# Altium PCB MGMEZZ02.PCBDOC (part 1 of 5)
Units mil, origin at the board's own origin, x right, y up, seen from the top; angles counter-clockwise.
Board outline 5705.83 x 3625.73 mil, 6 copper layers (Top Layer, Internal Plane 1, Mid-Layer 1, Mid-Layer 2, Internal Plane 2, Bottom Layer); 570 components, 354 nets, 2192 pads, 728 vias.
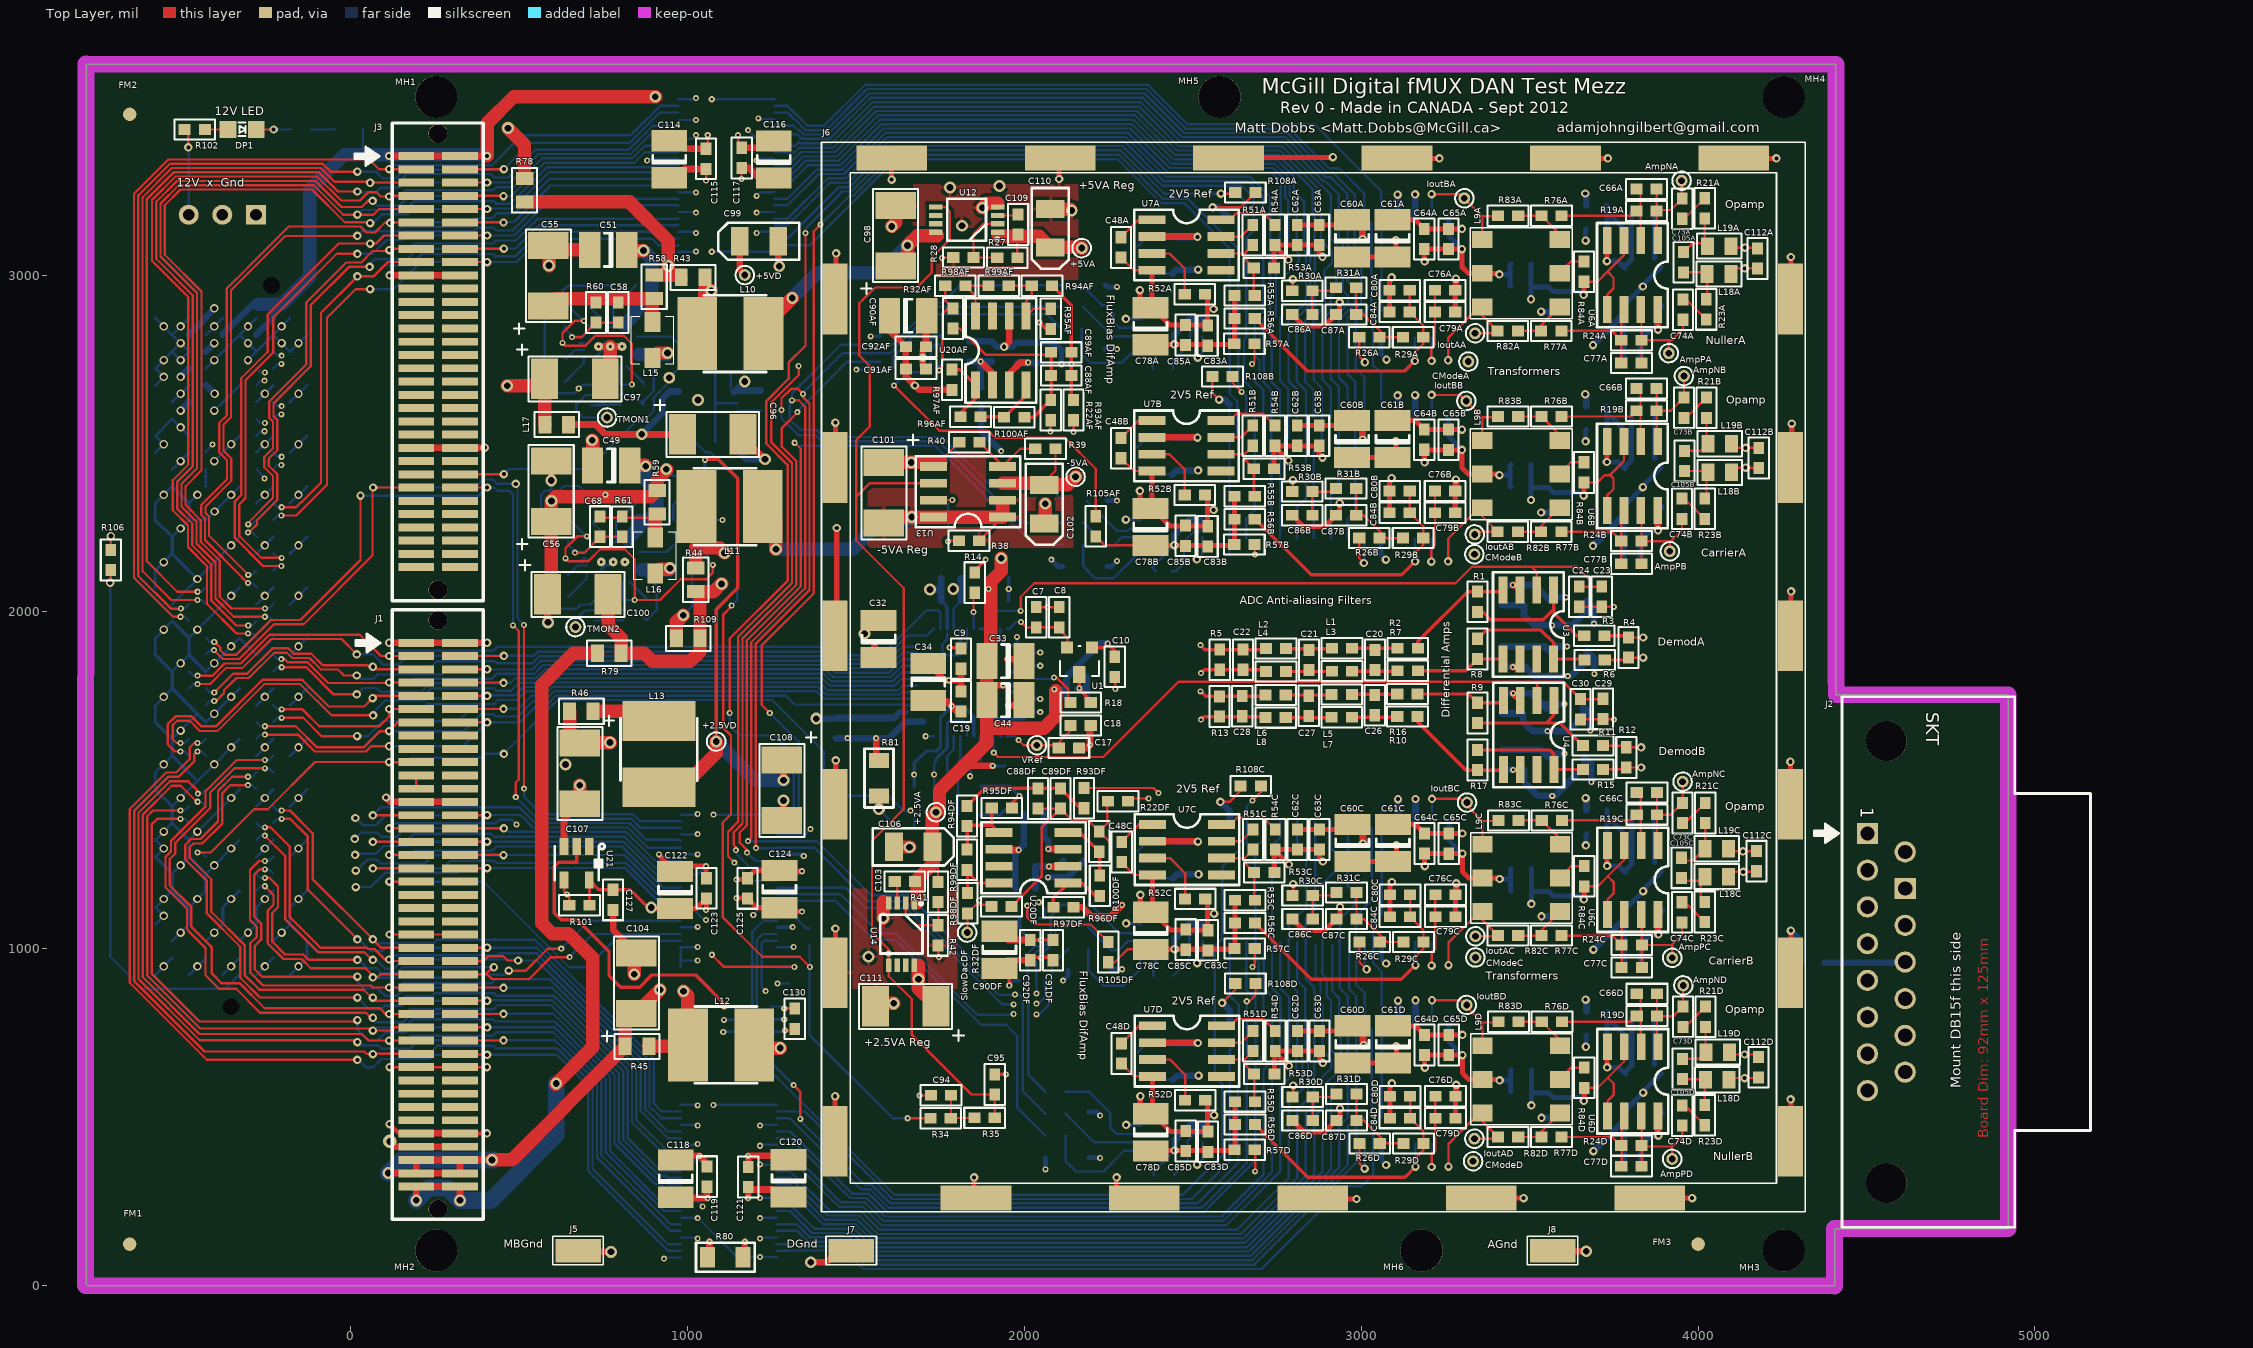
[diagram p0: Top Layer view]
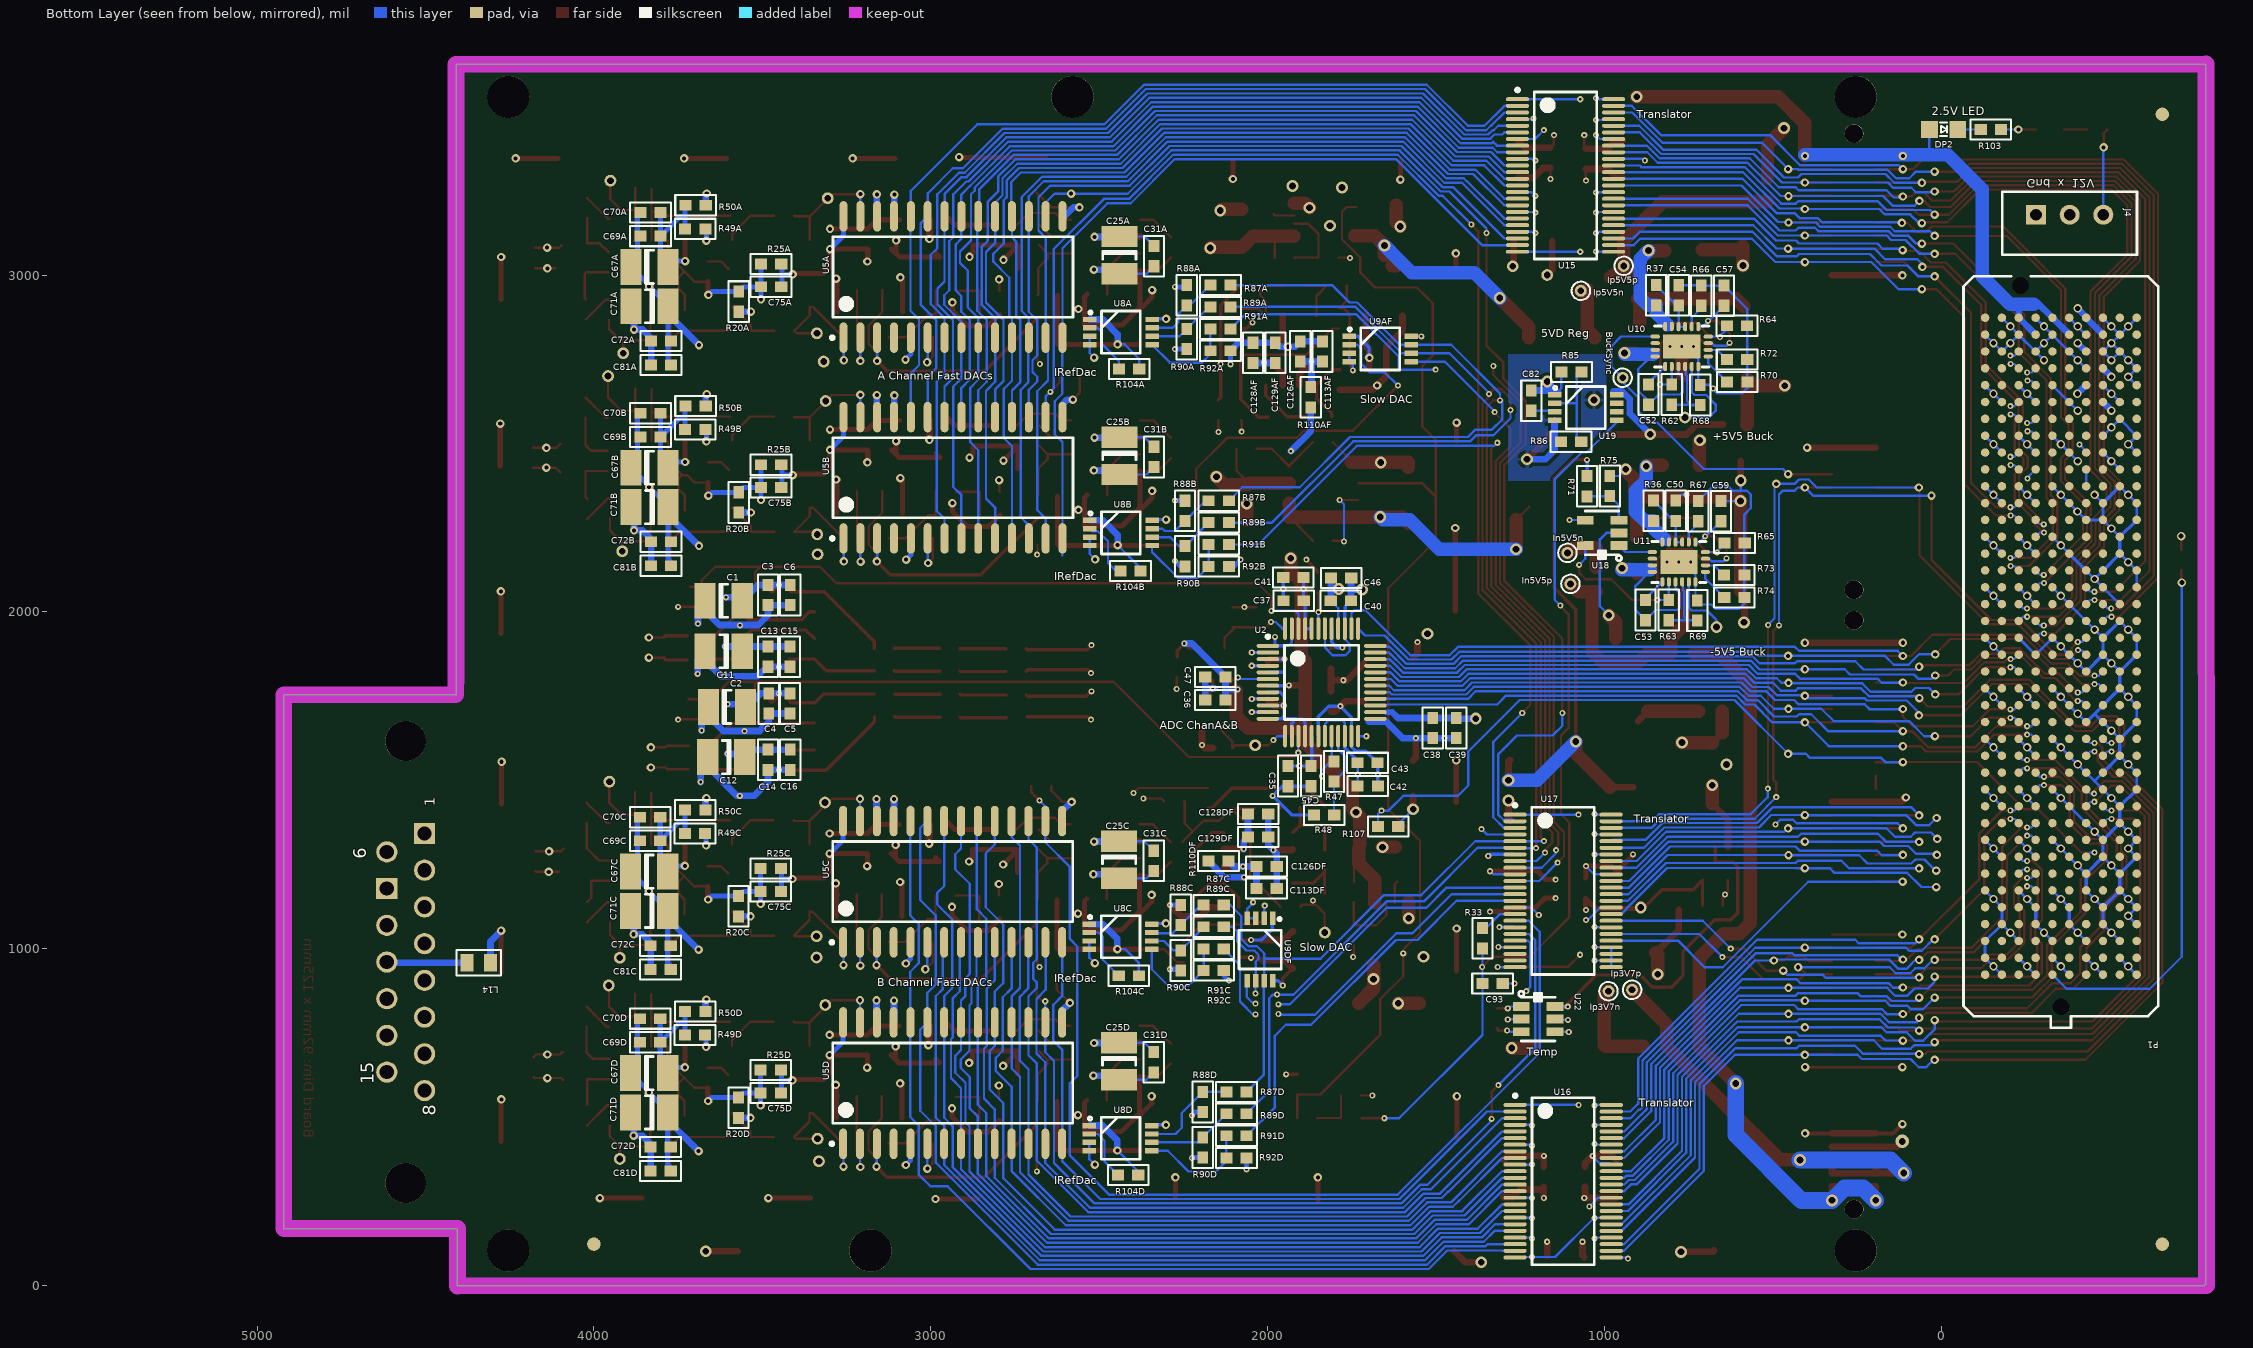
[diagram p1: Bottom Layer view, seen from below]
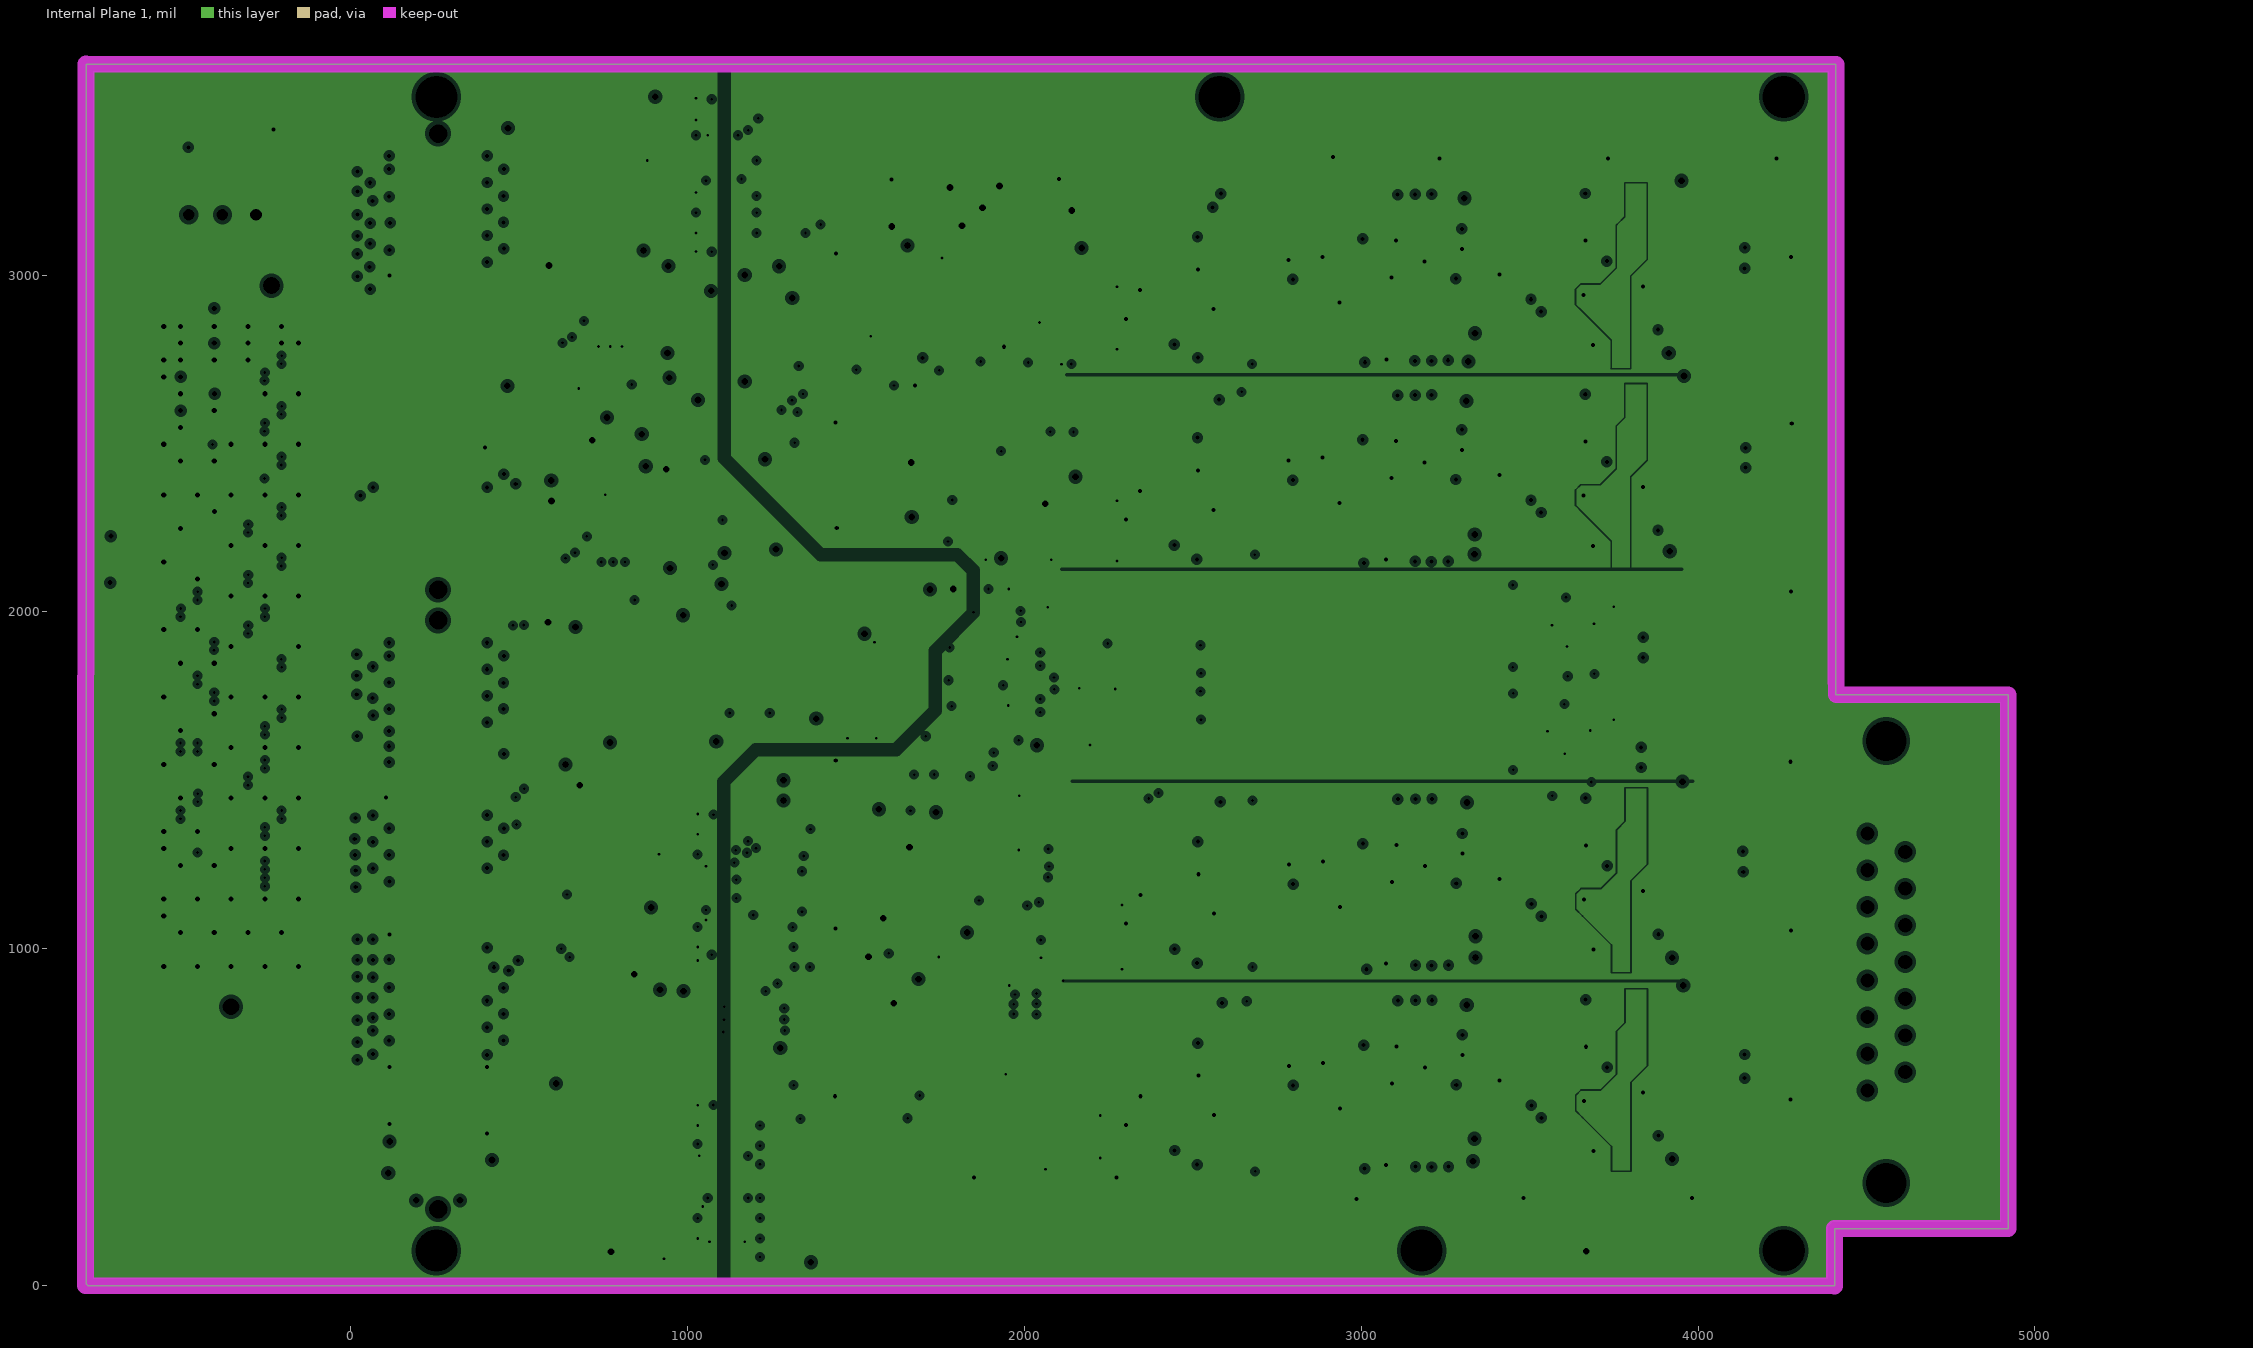
[diagram p2: Internal Plane 1, clearances drawn from the general rule]
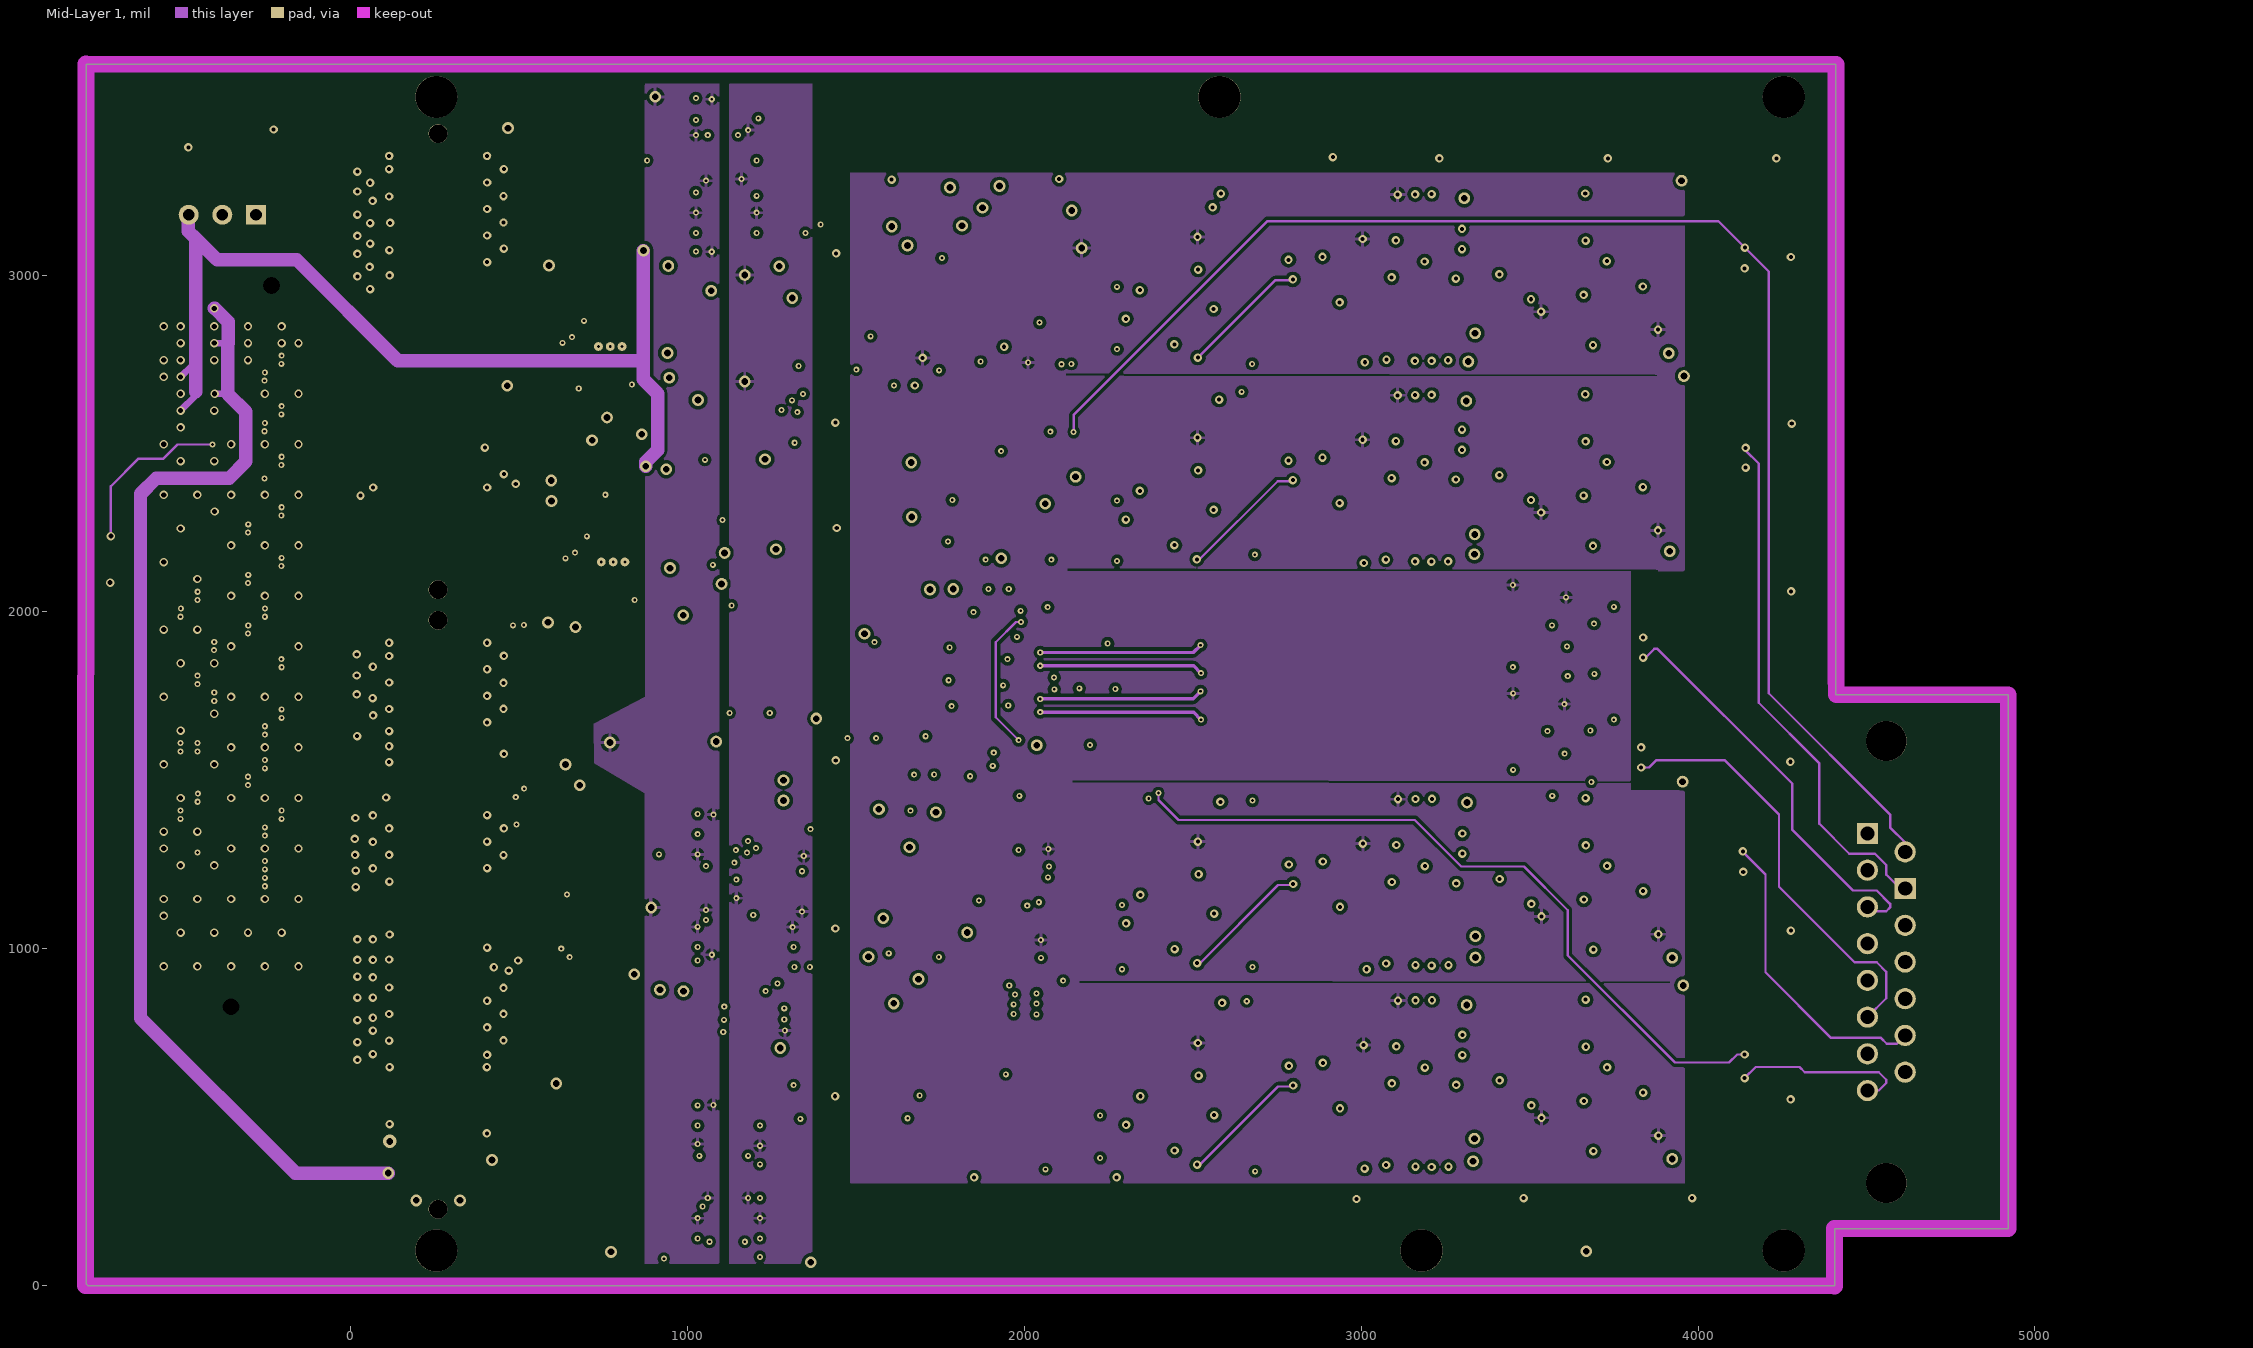
[diagram p3: Mid-Layer 1]
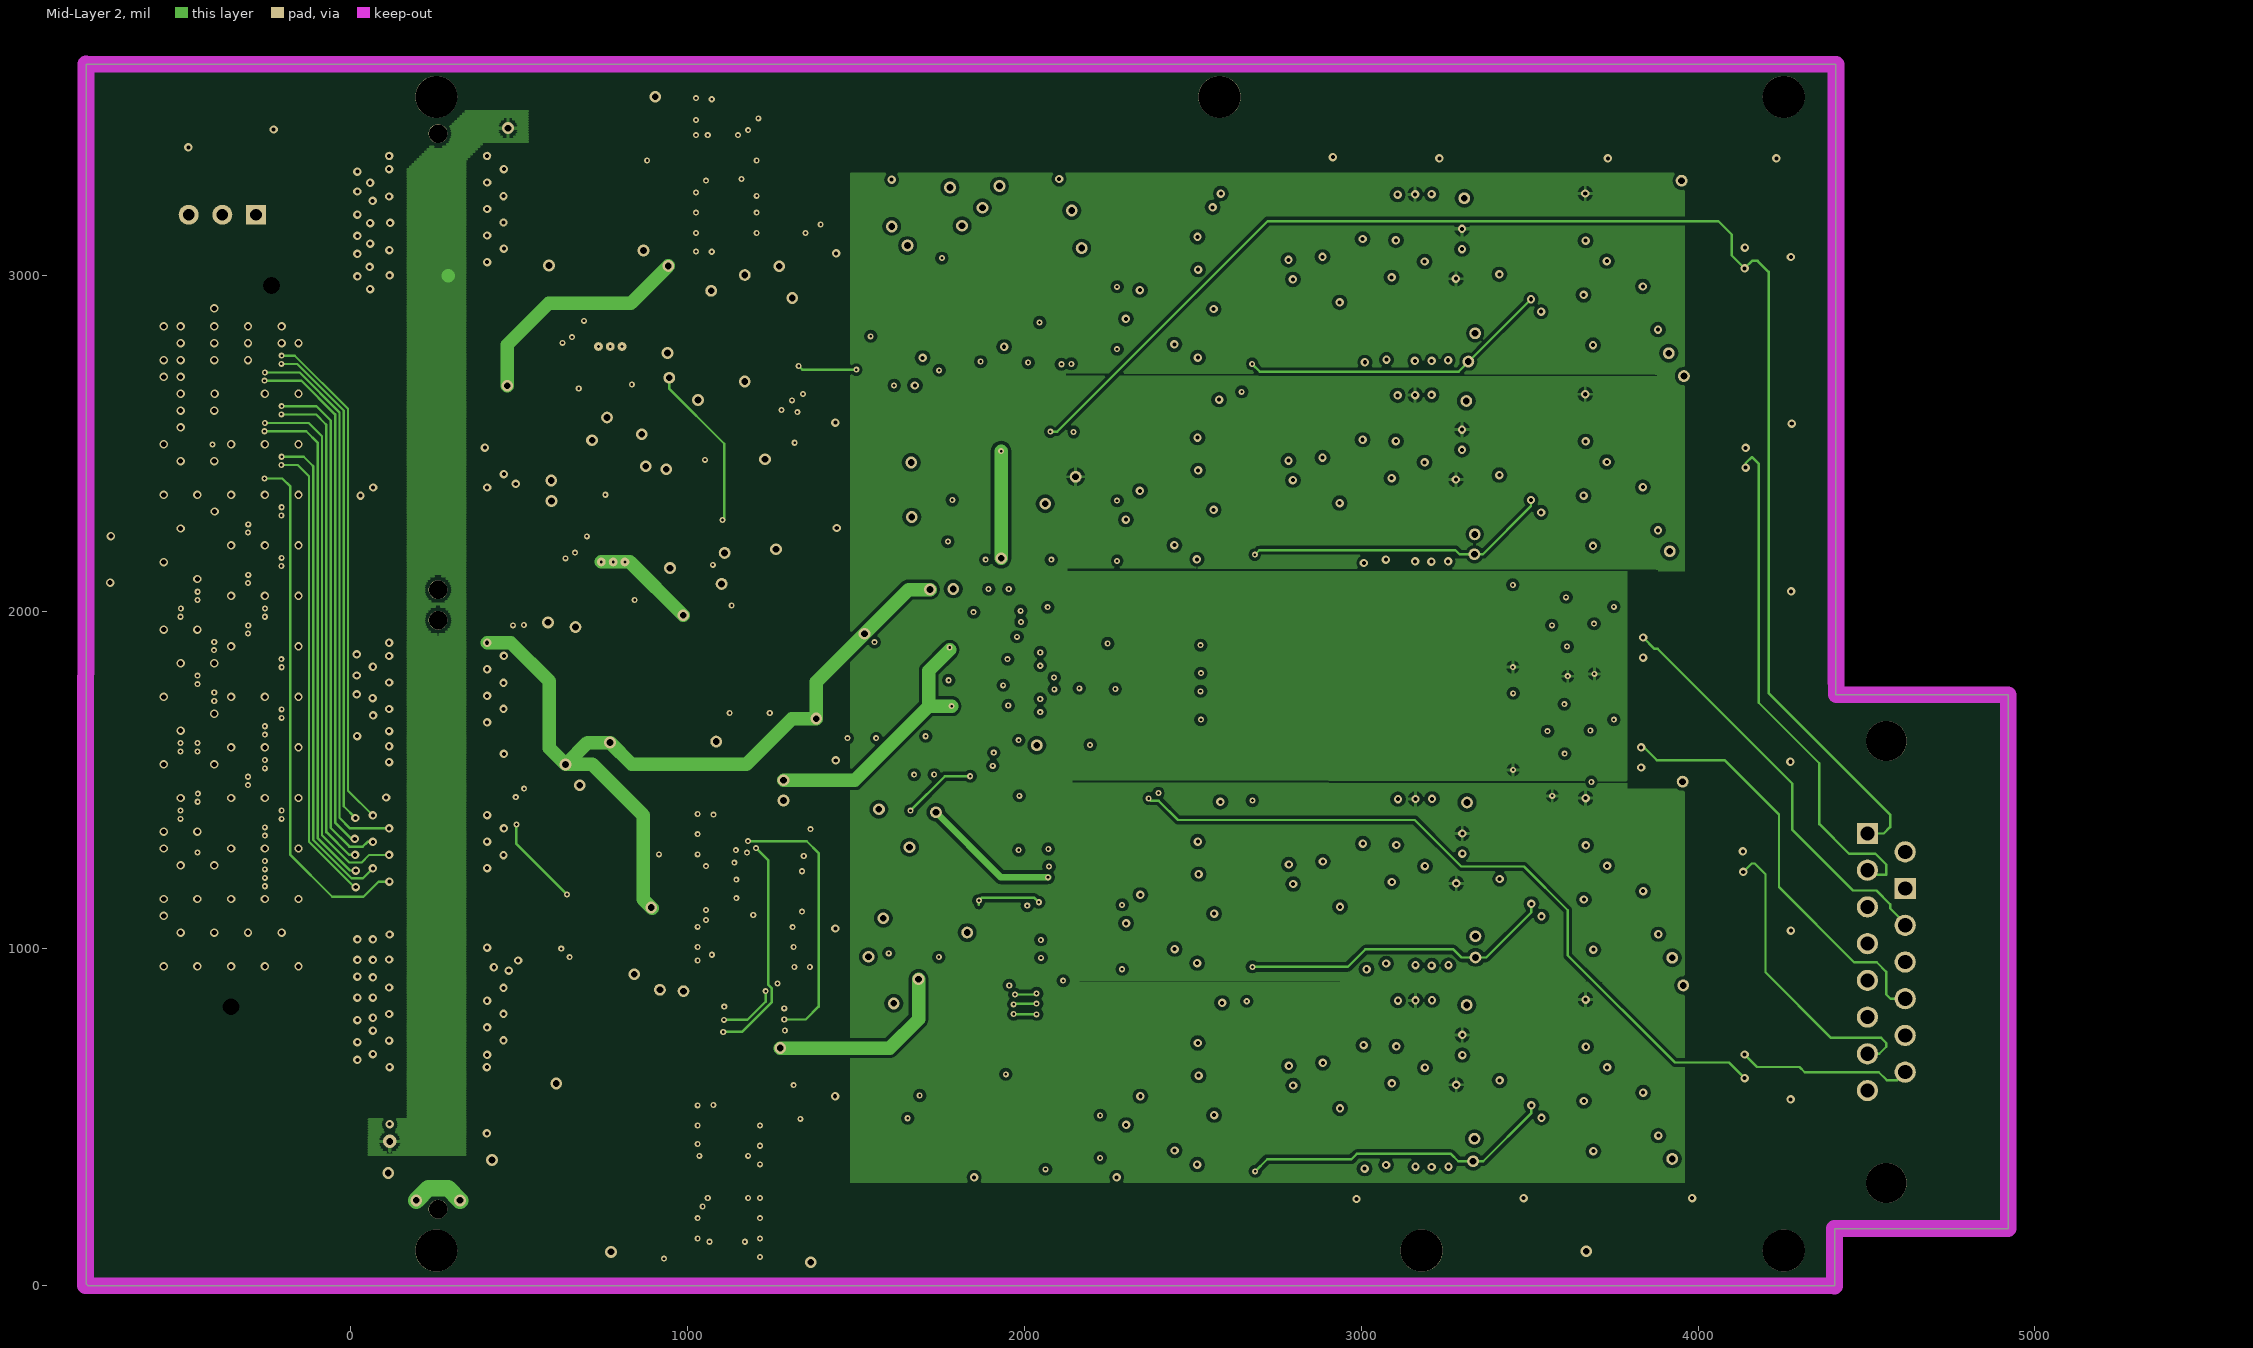
[diagram p4: Mid-Layer 2]
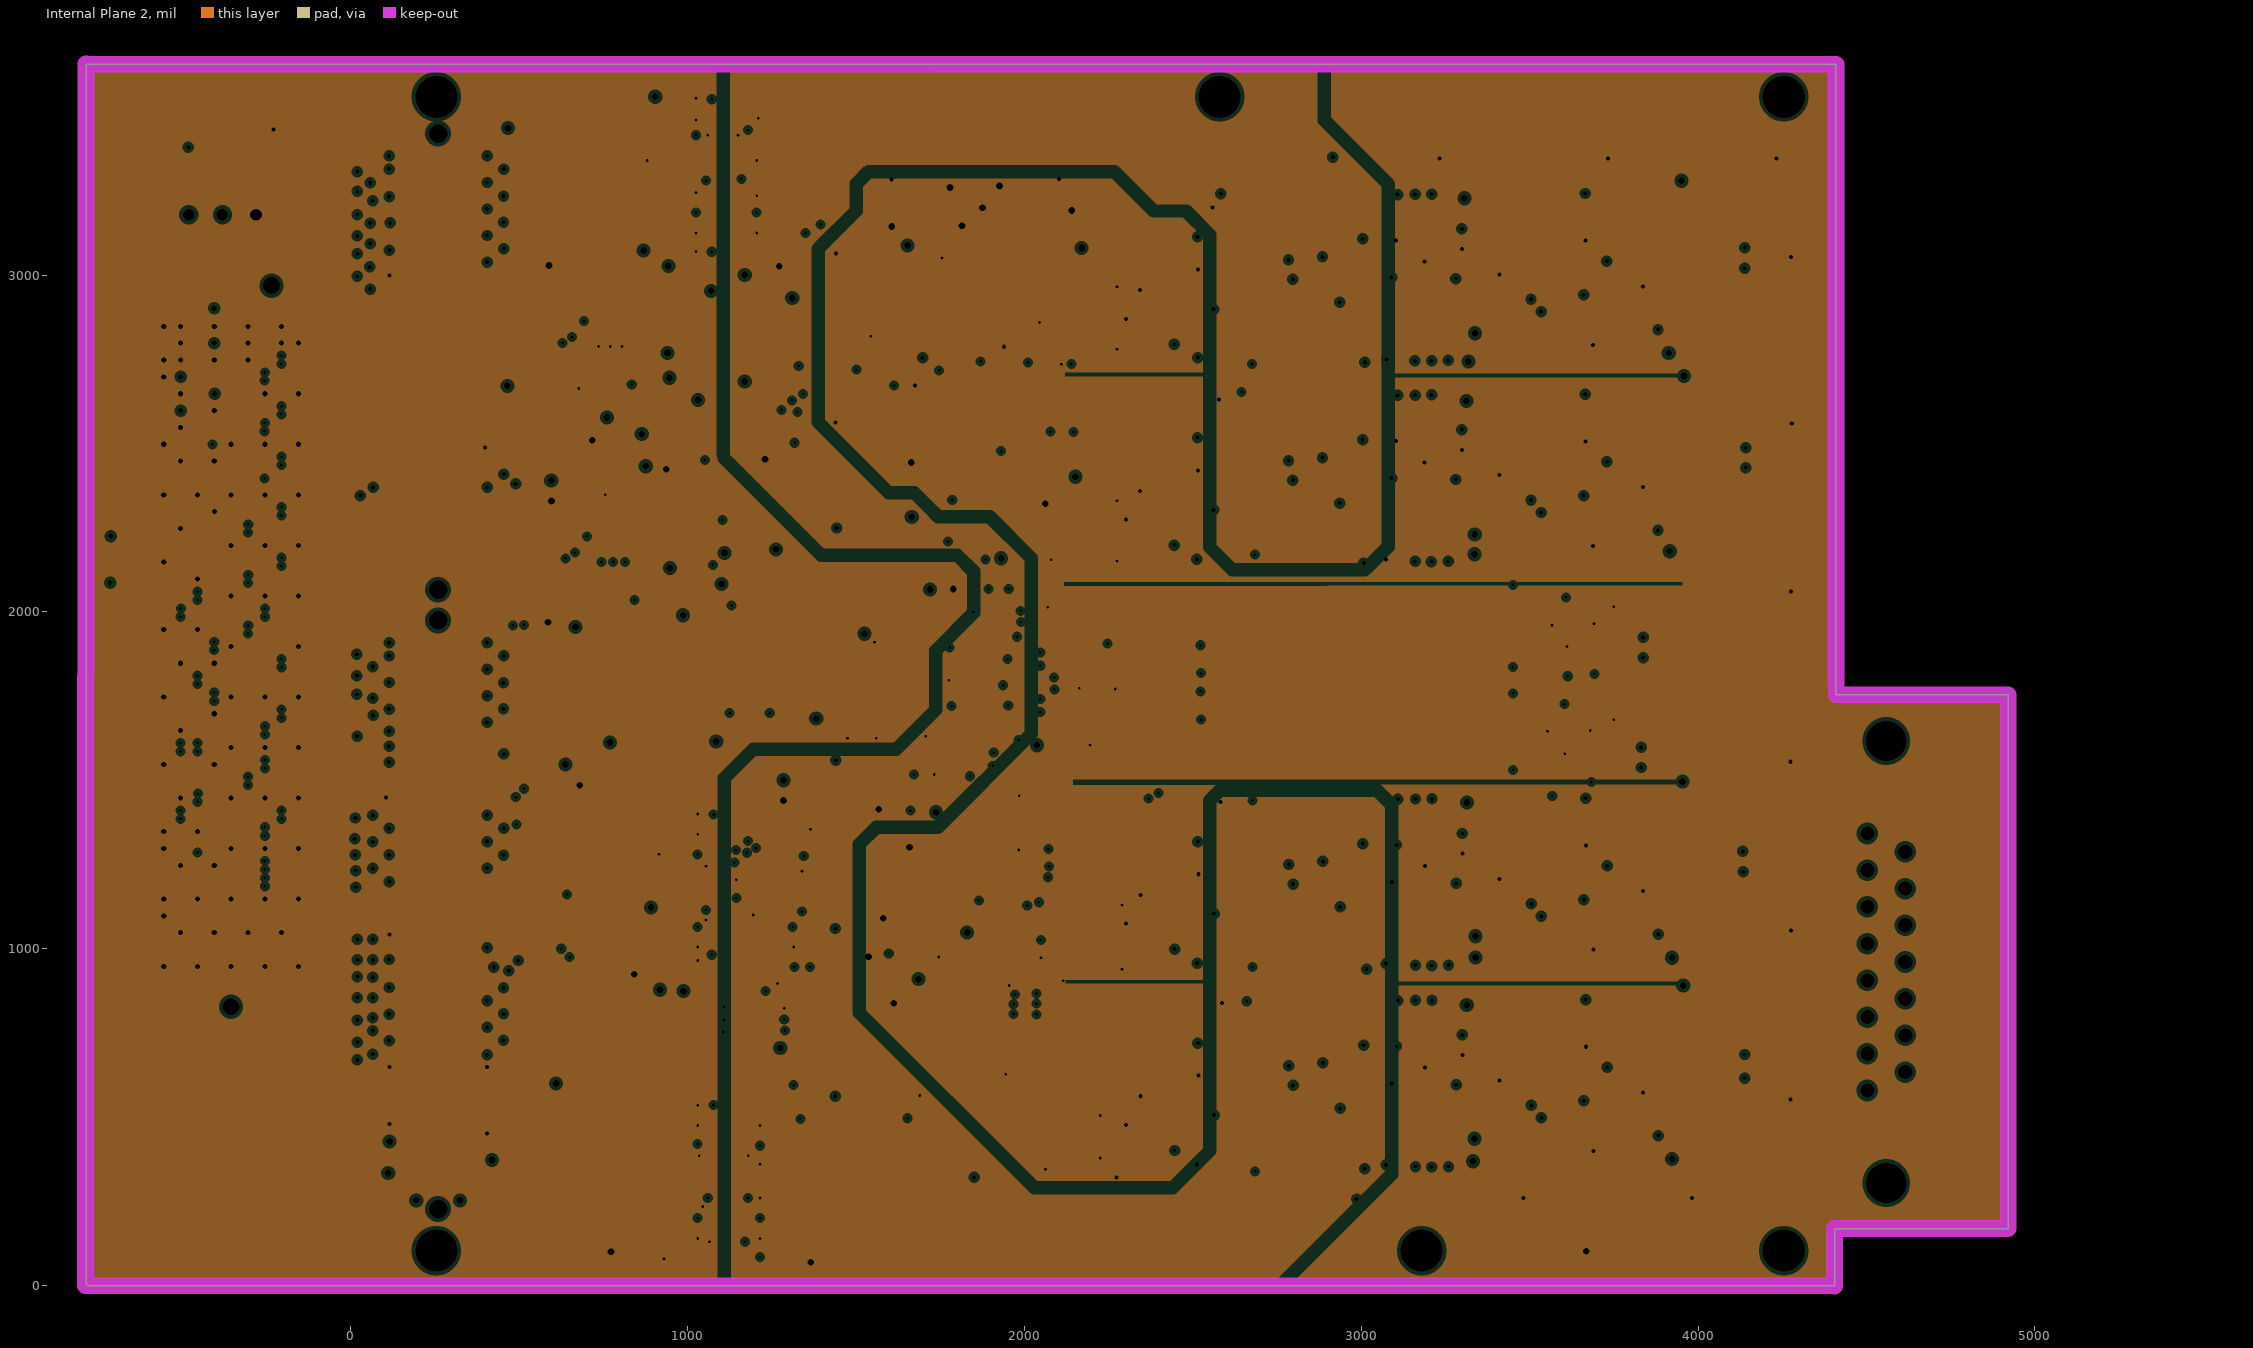
[diagram p5: Internal Plane 2, clearances drawn from the general rule]

## Layer stack, top to bottom
Top Layer: signal copper 1.4
Dielectric: core 12.6, FR-4, Dk 4.8
Internal Plane 1: plane copper 1.4, net (Multiple Nets)
Dielectric: prepreg 12.6, FR-4, Dk 4.8
Mid-Layer 1: signal copper 1.4
Dielectric: core 12.6, FR-4, Dk 4.8
Mid-Layer 2: signal copper 1.4
Dielectric: prepreg 12.6, FR-4, Dk 4.8
Internal Plane 2: plane copper 1.4, net (Multiple Nets)
Dielectric: core 12.6, FR-4, Dk 4.8
Bottom Layer: signal copper 1.4

## Board outline
-785,5 -785,3625.73 4409.07,3625.73 4409.07,1754 4920.83,1754 4920.83,169 4405,169 4405,0 -780,0

## Design rules (kind name [scope] priority, off if disabled: settings)
Clearance Clearance_1 [(InPoly)] p1: gap=10
Clearance [All] p2: gap=6
ComponentClearance [All] p1 off: gap=10 collisioncheckmode=3 verticalgap=10 showdistances=FALSE
DiffPairsRouting [All] p1: maxlimit=10 minlimit=10 mostfreqgap=10 maxuncoupledlength=500
FabricationTestPointUsage TestPointUsage [All] p1: valid=0 allowmultiple=FALSE
FabricationTestpoint Testpoint [All] p1: side=3 testpointundercomponent=TRUE minsize=40 maxsize=100 preferedsize=60 minholesize=20 maxholesize=40 preferedholesize=32 testpointgrid=1 allowsidetop=TRUE allowsidebottom=TRUE usegrid=TRUE gridtolerance=0.01
HoleSize [All] p1: absolutevalues=TRUE maxlimit=250 minlimit=8 maxpercent=80.000 minpercent=20.000
PlaneClearance [All] p1: clearance=11
PlaneConnect PlaneConnect_1 [All] p1: planeconnectstyle=Direct reliefexpansion=20 reliefentries=4 reliefconductorwidth=10 reliefairgap=10
PlaneConnect [All] p2: planeconnectstyle=Relief reliefexpansion=20 reliefentries=4 reliefconductorwidth=10 reliefairgap=12
PolygonConnect [All] p1: connectstyle=Relief reliefconductorwidth=10 reliefentries=4 polygonreliefangle="90 Angle" airgapwidth=10
RoomDefinition C [InComponentClass('C')] p1: confinementstyle=ConfineIn formatcopy=TRUE lockcomponents=FALSE outline 2243,903 4099,903 4099,1501 2243,1501
RoomDefinition DF [InComponentClass('DF')] p2: confinementstyle=ConfineIn formatcopy=TRUE lockcomponents=FALSE outline -3458.97,-4906.75 -1458.97,-4906.75 -1458.97,-3906.75 -3458.97,-3906.75
RoomDefinition Conn1 [InComponentClass('Conn1')] p3: confinementstyle=ConfineIn formatcopy=TRUE lockcomponents=FALSE outline -3458.97,-4906.75 -1458.97,-4906.75 -1458.97,-3906.75 -3458.97,-3906.75
RoomDefinition AF [InComponentClass('AF')] p4: confinementstyle=ConfineIn formatcopy=TRUE lockcomponents=FALSE outline -3458.97,-4906.75 -1458.97,-4906.75 -1458.97,-3906.75 -3458.97,-3906.75
RoomDefinition Power [InComponentClass('Power')] p5: confinementstyle=ConfineIn formatcopy=TRUE lockcomponents=FALSE outline -3458.97,-4906.75 -1458.97,-4906.75 -1458.97,-3906.75 -3458.97,-3906.75
RoomDefinition MGMEZZ02 [InComponentClass('MGMEZZ02')] p6: confinementstyle=ConfineIn formatcopy=TRUE lockcomponents=FALSE outline -3458.97,-4906.75 -1458.97,-4906.75 -1458.97,-3906.75 -3458.97,-3906.75
RoomDefinition Lvl [InComponentClass('Lvl')] p7: confinementstyle=ConfineIn formatcopy=TRUE lockcomponents=FALSE outline -3458.97,-4906.75 -1458.97,-4906.75 -1458.97,-3906.75 -3458.97,-3906.75
RoomDefinition Conn2 [InComponentClass('Conn2')] p8: confinementstyle=ConfineIn formatcopy=TRUE lockcomponents=FALSE outline -3458.97,-4906.75 -1458.97,-4906.75 -1458.97,-3906.75 -3458.97,-3906.75
RoomDefinition A [InComponentClass('A')] p9: confinementstyle=ConfineIn formatcopy=TRUE lockcomponents=FALSE outline 2242,2698 4098,2698 4098,3296 2242,3296
RoomDefinition D [InComponentClass('D')] p10: confinementstyle=ConfineIn formatcopy=TRUE lockcomponents=FALSE outline 2243,305 4099,305 4099,903 2243,903
RoomDefinition B [InComponentClass('B')] p11: confinementstyle=ConfineIn formatcopy=TRUE lockcomponents=FALSE outline 2242,2102 4098,2102 4098,2700 2242,2700
RoomDefinition ADC [InComponentClass('ADC')] p12: confinementstyle=ConfineIn formatcopy=TRUE lockcomponents=FALSE outline 1344.06,1433 3855,1433 3855,2162.02 1344.06,2162.02
RoutingVias [All] p1: holewidth=12 width=25 viastyle="Through Hole" minholewidth=12 minwidth=22 maxholewidth=28 maxwidth=50
SilkscreenOverComponentPads [All] p1: minsilkscreentomaskgap=10
SolderMaskExpansion [All] p1: expansion=4
Width [All] p1: maxlimit=100 minlimit=2 preferedwidth=7
20 further rules are at their usual default settings.

## Classes and differential pairs
component class DF: C88DF C89DF C90DF C91DF C92DF C113DF C126DF C128DF C129DF R22DF R32DF R93DF R94DF R95DF R96DF R97DF R98DF R99DF R100DF R105DF R110DF SlowDacDF U9DF U20DF
component class AF: C88AF C89AF C90AF C91AF C92AF C113AF C126AF C128AF C129AF R22AF R32AF R93AF R94AF R95AF R96AF R97AF R98AF R99AF R100AF R105AF R110AF U9AF U20AF
channel class SlowDAC: SlowDac1 SlowDac2
channel class FastDAC: A B C D
component class D: AmpND AmpPD C25D C31D C48D C60D C61D C62D C63D C64D C65D C66D C67D C69D C70D C71D C72D C73D C74D C75D C76D C77D C78D C79D C80D C81D C83D C84D C85D C86D C87D C105D C112D CModeD IoutAD IoutBD L9D L18D L19D R19D R20D R21D R23D R24D R25D R26D R29D R30D R31D R49D R50D R51D R52D R53D R54D R55D R56D R57D R76D R77D R82D R83D R84D R87D R88D R89D R90D R91D R92D R104D R108D U5D U6D U7D U8D
component class Power: +2.5VA +2.5VD +5VA +5VD -5VA BuckSync C49 C50 C51 C52 C53 C54 C55 C56 C57 C58 C59 C68 C82 C93 C94 C95 C96 C97 C98 C99 C100 C101 C102 C103 C104 C106 C107 C108 C109 C110 C111 DP1 DP2 In5V5n In5V5p Ip3V7n Ip3V7p Ip5V5n Ip5V5p J4 L10 L11 L12 L13 L15 L16 L17 R27 R28 R33 R34 R35 R36 R37 R38 R39 R40 R41 R42 R43 R44 R45 R46 R58 R59 R60 R61 R62 R63 R64 R65 R66 R67 R68 R69 R70 R71 R72 R73 R74 R75 R78 R79 R80 R81 R85 R86 R102 R103 R109 TMON1 TMON2 U10 U11 U12 U13 U14 U18 U19
component class C: AmpNC AmpPC C25C C31C C48C C60C C61C C62C C63C C64C C65C C66C C67C C69C C70C C71C C72C C73C C74C C75C C76C C77C C78C C79C C80C C81C C83C C84C C85C C86C C87C C105C C112C CModeC IoutAC IoutBC L9C L18C L19C R19C R20C R21C R23C R24C R25C R26C R29C R30C R31C R49C R50C R51C R52C R53C R54C R55C R56C R57C R76C R77C R82C R83C R84C R87C R88C R89C R90C R91C R92C R104C R108C U5C U6C U7C U8C
component class Lvl: C114 C115 C116 C117 C118 C119 C120 C121 C122 C123 C124 C125 C127 C130 R101 U15 U16 U17 U21 U22
component class B: AmpNB AmpPB C25B C31B C48B C60B C61B C62B C63B C64B C65B C66B C67B C69B C70B C71B C72B C73B C74B C75B C76B C77B C78B C79B C80B C81B C83B C84B C85B C86B C87B C105B C112B CModeB IoutAB IoutBB L9B L18B L19B R19B R20B R21B R23B R24B R25B R26B R29B R30B R31B R49B R50B R51B R52B R53B R54B R55B R56B R57B R76B R77B R82B R83B R84B R87B R88B R89B R90B R91B R92B R104B R108B U5B U6B U7B U8B
component class A: AmpNA AmpPA C25A C31A C48A C60A C61A C62A C63A C64A C65A C66A C67A C69A C70A C71A C72A C73A C74A C75A C76A C77A C78A C79A C80A C81A C83A C84A C85A C86A C87A C105A C112A CModeA IoutAA IoutBA L9A L18A L19A R19A R20A R21A R23A R24A R25A R26A R29A R30A R31A R49A R50A R51A R52A R53A R54A R55A R56A R57A R76A R77A R82A R83A R84A R87A R88A R89A R90A R91A R92A R104A R108A U5A U6A U7A U8A
component class ADC: C1 C2 C3 C4 C5 C6 C7 C8 C9 C10 C11 C12 C13 C14 C15 C16 C17 C18 C19 C20 C21 C22 C23 C24 C26 C27 C28 C29 C30 C32 C33 C34 C35 C36 C37 C38 C39 C40 C41 C42 C43 C44 C45 C46 C47 C138 L1 L2 L3 L4 L5 L6 L7 L8 R1 R2 R3 R4 R5 R6 R7 R8 R9 R10 R11 R12 R13 R14 R15 R16 R17 R18 R47 R48 R107 U1 U2 U3 U4 VRef
component class MGMEZZ02: FM1 FM2 FM3 J2 J5 J6 J7 J8 L14 MH1 MH2 MH3 MH4 MH5 MH6
component class Conn1: J1 J3
component class Conn2: P1 R106
differential pair DACD: +DACD_P -DACD_N
differential pair DACC: +DACC_P -DACC_N
differential pair DACB: +DACB_P -DACB_N
differential pair DACA: +DACA_P -DACA_N
differential pair ADCB: +ADCB_P -ADCB_N
differential pair ADCA: +ADCA_P -ADCA_N

## Components (designator, comment, footprint, x,y, rotation, side; value= is the part's Value field where it differs from the comment)
+2.5VA "TestPoint" TP-3520-SK 1737.44,1405.02 r0 top
+2.5VD "TestPoint" TP-3520-SK 1085,1615 r90 top
+5VA "TestPoint" TP-3520-SK 2169.94,3079.91 r270 top
+5VD "TestPoint" TP-3520-SK 1170,2999.97 r90 top
-5VA "TestPoint" TP-3520-SK 2152,2401 r270 top
AmpNA "TestPoint" TP-3520-SK 3951,3280 r90 top (schematic designator AmpN)
AmpNB "TestPoint" TP-3520-SK 3958,2700 r90 top (schematic designator AmpN)
AmpNC "TestPoint" TP-3520-SK 3954,1496 r90 top (schematic designator AmpN)
AmpND "TestPoint" TP-3520-SK 3956,891 r90 top (schematic designator AmpN)
AmpPA "TestPoint" TP-3520-SK 3913,2768 r90 top (schematic designator AmpP)
AmpPB "TestPoint" TP-3520-SK 3916,2180 r90 top (schematic designator AmpP)
AmpPC "TestPoint" TP-3520-SK 3923,973 r90 top (schematic designator AmpP)
AmpPD "TestPoint" TP-3520-SK 3923,376 r90 top (schematic designator AmpP)
BuckSync "TestPoint" TP-3520-SK 946,2695 r90 bottom
C1 "33uF" CC3225-1210 3615,2033 r180 bottom
C2 "33uF" CC3225-1210 3605,1718 r180 bottom
C3 "1uF" 0603 3483,2020 r90 bottom
C4 "1uF" 0603 3481,1698 r90 bottom
C5 "0.1uF" 0603 3418,1758 r270 bottom
C6 "0.1uF" 0603 3417,2080 r270 bottom
C7 "1uF" 0603 2035.22,2014 r270 top
C8 "10nF" 0603 2103.22,2014 r270 top
C9 "470nF" 0603 1812,1831 r90 top
C10 "1uF" 0603 2268.18,1806.76 r90 top
C11 "33uF" CC3225-1210 3615,1883 r0 bottom
C12 "33uF" CC3225-1210 3607,1569 r0 bottom
C13 "1uF" 0603 3483,1897 r270 bottom
C14 "1uF" 0603 3483,1591 r270 bottom
C15 "0.1uF" 0603 3418,1837 r90 bottom
C16 "0.1uF" 0603 3417,1531 r90 bottom
C17 "1uF" 0603 2162,1596 r180 top
C18 "10nF" 0603 2197,1663 r180 top
C19 "470nF" 0603 1812,1764 r270 top
C20 "16p" 0603 3041,1827 r90 top
C21 "100p" 0603 2845,1827 r90 top
C22 "16p" 0603 2649,1828 r90 top
C23 "1uF" 0603 3714,2015 r90 top
C24 "10nF" 0603 3647,2015 r90 top
C25A "33uF" CC3225-1210 2440,3059 r270 bottom (schematic designator C25)
C25B "33uF" CC3225-1210 2440,2463 r270 bottom (schematic designator C25)
C25C "33uF" CC3225-1210 2441,1264 r270 bottom (schematic designator C25)
C25D "33uF" CC3225-1210 2441,666 r270 bottom (schematic designator C25)
C26 "16p" 0603 3040,1693 r90 top
C27 "100p" 0603 2844,1691 r90 top
C28 "16p" 0603 2647,1690 r90 top
C29 "1uF" 0603 3718,1682 r90 top
C30 "10nF" 0603 3651,1681 r90 top
C31A "1nF" 0603 2337,3086 r270 bottom (schematic designator C31)
C31B "1nF" 0603 2337,2490 r270 bottom (schematic designator C31)
C31C "1nF" 0603 2338,1291 r270 bottom (schematic designator C31)
C31D "1nF" 0603 2338,693 r270 bottom (schematic designator C31)
C32 "33uF" CC3225-1210 1567.31,1919.46 r90 top
C33 "33uF" CC3225-1210 1944,1854 r180 top
C34 "33uF" CC3225-1210 1714.35,1791.73 r270 top
C35 "470nF" 0603 1939.78,1482.41 r90 bottom
C36 "470nF" 0603 2185.22,1738.4 r180 bottom
C37 "470nF" 0603 1952.59,2032.78 r180 bottom
C38 "470nF" 0603 1510,1625 r90 bottom
C39 "470nF" 0603 1440,1625 r90 bottom
C40 "470nF" 0603 1812.59,2032.78 r180 bottom
C41 "470nF" 0603 1953.59,2101.78 r180 bottom
C42 "470nF" 0603 1732.59,1482.78 r180 bottom
C43 "470nF" 0603 1733.59,1551.78 r180 bottom
C44 "33uF" CC3225-1210 1944,1738 r180 top
C45 "470nF" 0603 1870.78,1482.41 r90 bottom
C46 "470nF" 0603 1811.59,2100.78 r180 bottom
C47 "470nF" 0603 2185.22,1806.4 r180 bottom
C48A "DNL" 0603 2287,3112 r270 top (schematic designator C48)
C48B "DNL" 0603 2287,2516 r270 top (schematic designator C48)
C48C "DNL" 0603 2289,1317 r270 top (schematic designator C48)
C48D "DNL" 0603 2288,719 r270 top (schematic designator C48)
C49 "33uF" CC3225-1210 773.07,2434.64 r180 top
C50 "0.33uF" 0603 788.3,2330.09 r270 bottom
C51 "33uF" CC3225-1210 764.48,3074.33 r180 top
C52 "0.1uF" 0603 869.39,2614.96 r90 bottom
C53 "0.1uF" 0603 877.98,1975.27 r90 bottom
C54 "0.33uF" 0603 779.72,2969.78 r270 bottom
C55 "33uF" TANT4532 586.85,2907.97 r90 top
C56 "33uF" TANT4532 595.43,2268.28 r90 top
C57 "2.2uF" 0603 645.51,2968.62 r270 bottom
C58 "22pF" 0603 794.53,2858.6 r90 top
C59 "2.2uF" 0603 654.09,2328.94 r270 bottom
C60A "33uF" CC3225-1210 2973,3109 r90 top (schematic designator C60)
C60B "33uF" CC3225-1210 2973,2513 r90 top (schematic designator C60)
C60C "33uF" CC3225-1210 2974,1314 r90 top (schematic designator C60)
C60D "33uF" CC3225-1210 2974,716 r90 top (schematic designator C60)
C61A "33uF" CC3225-1210 3093,3109 r90 top (schematic designator C61)
C61B "33uF" CC3225-1210 3093,2513 r90 top (schematic designator C61)
C61C "33uF" CC3225-1210 3094,1314 r90 top (schematic designator C61)
C61D "33uF" CC3225-1210 3094,716 r90 top (schematic designator C61)
C62A "0.1uF" 0603 2810,3089 r90 top (schematic designator C62)
C62B "0.1uF" 0603 2810,2493 r90 top (schematic designator C62)
C62C "0.1uF" 0603 2811,1294 r90 top (schematic designator C62)
C62D "0.1uF" 0603 2811,696 r90 top (schematic designator C62)
C63A "1uF" 0603 2875,3089 r90 top (schematic designator C63)
C63B "1uF" 0603 2875,2493 r90 top (schematic designator C63)
C63C "1uF" 0603 2876,1294 r90 top (schematic designator C63)
C63D "1uF" 0603 2876,696 r90 top (schematic designator C63)
C64A "0.1uF" 0603 3187,3077.12 r90 top (schematic designator C64)
C64B "0.1uF" 0603 3187,2481.12 r90 top (schematic designator C64)
C64C "0.1uF" 0603 3188,1282.12 r90 top (schematic designator C64)
C64D "0.1uF" 0603 3188,684.12 r90 top (schematic designator C64)
C65A "1uF" 0603 3259,3077 r90 top (schematic designator C65)
C65B "1uF" 0603 3259,2481 r90 top (schematic designator C65)
C65C "1uF" 0603 3260,1282 r90 top (schematic designator C65)
C65D "1uF" 0603 3260,684 r90 top (schematic designator C65)
C66A "10pF" 0603 3817,3255 r0 top (schematic designator C66)
C66B "10pF" 0603 3817,2663 r0 top (schematic designator C66)
C66C "10pF" 0603 3818,1464 r0 top (schematic designator C66)
C66D "10pF" 0603 3818,866 r0 top (schematic designator C66)
C67A "33uF" CC3225-1210 3835,3024 r180 bottom (schematic designator C67)
C67B "33uF" CC3225-1210 3835,2428 r180 bottom (schematic designator C67)
C67C "33uF" CC3225-1210 3836,1229 r180 bottom (schematic designator C67)
C67D "33uF" CC3225-1210 3836,631 r180 bottom (schematic designator C67)
C68 "22pF" 0603 739.94,2223.02 r90 top
C69A "1uF" 0603 3802,3115.4 r0 bottom (schematic designator C69)
C69B "1uF" 0603 3802,2519.4 r0 bottom (schematic designator C69)
C69C "1uF" 0603 3803,1320.4 r0 bottom (schematic designator C69)
C69D "1uF" 0603 3803,722.4 r0 bottom (schematic designator C69)
C70A "0.1uF" 0603 3802,3185.4 r0 bottom (schematic designator C70)
C70B "0.1uF" 0603 3802,2589.4 r0 bottom (schematic designator C70)
C70C "0.1uF" 0603 3803,1390.4 r0 bottom (schematic designator C70)
C70D "0.1uF" 0603 3803,792.4 r0 bottom (schematic designator C70)
C71A "33uF" CC3225-1210 3835,2907 r0 bottom (schematic designator C71)
C71B "33uF" CC3225-1210 3835,2311 r0 bottom (schematic designator C71)
C71C "33uF" CC3225-1210 3836,1112 r0 bottom (schematic designator C71)
C71D "33uF" CC3225-1210 3836,514 r0 bottom (schematic designator C71)
C72A "1uF" 0603 3831,2804 r180 bottom (schematic designator C72)
C72B "1uF" 0603 3831,2208 r180 bottom (schematic designator C72)
C72C "1uF" 0603 3832,1009 r180 bottom (schematic designator C72)
C72D "1uF" 0603 3832,411 r180 bottom (schematic designator C72)
C73A "100nF" 0603 3953,3167 r90 top (schematic designator C73)
C73B "100nF" 0603 3958,2576 r90 top (schematic designator C73)
C73C "100nF" 0603 3954,1373 r90 top (schematic designator C73)
C73D "100nF" 0603 3955,768 r90 top (schematic designator C73)
C74A "100nF" 0603 3955,2927 r270 top (schematic designator C74)
C74B "100nF" 0603 3952,2336 r270 top (schematic designator C74)
C74C "100nF" 0603 3952,1138 r270 top (schematic designator C74)
C74D "100nF" 0603 3953,535 r270 top (schematic designator C74)
C75A "0.1uF" 0603 3444,2965 r0 bottom (schematic designator C75)
C75B "0.1uF" 0603 3444,2369 r0 bottom (schematic designator C75)
C75C "0.1uF" 0603 3445,1170 r0 bottom (schematic designator C75)
C75D "0.1uF" 0603 3445,572 r0 bottom (schematic designator C75)
C76A "1uF" 0603 3279,2955 r180 top (schematic designator C76)
C76B "1uF" 0603 3279,2359 r180 top (schematic designator C76)
C76C "1uF" 0603 3280,1160 r180 top (schematic designator C76)
C76D "1uF" 0603 3280,562 r180 top (schematic designator C76)
C77A "10pF" 0603 3772,2739 r0 top (schematic designator C77)
C77B "10pF" 0603 3772,2143 r0 top (schematic designator C77)
C77C "10pF" 0603 3773,944 r0 top (schematic designator C77)
C77D "10pF" 0603 3772,354 r0 top (schematic designator C77)
C78A "33uF" CC3225-1210 2374,2848 r90 top (schematic designator C78)
C78B "33uF" CC3225-1210 2374,2252 r90 top (schematic designator C78)
C78C "33uF" CC3225-1210 2375,1053 r90 top (schematic designator C78)
C78D "33uF" CC3225-1210 2375,455 r90 top (schematic designator C78)
C79A "0.1uF" 0603 3279,2890 r180 top (schematic designator C79)
C79B "0.1uF" 0603 3279,2294 r180 top (schematic designator C79)
C79C "0.1uF" 0603 3280,1095 r180 top (schematic designator C79)
C79D "0.1uF" 0603 3280,497 r180 top (schematic designator C79)
C80A "1uF" 0603 3144,2955 r180 top (schematic designator C80)
C80B "1uF" 0603 3144,2359 r180 top (schematic designator C80)
C80C "1uF" 0603 3145,1160 r180 top (schematic designator C80)
C80D "1uF" 0603 3145,562 r180 top (schematic designator C80)
C81A "0.1uF" 0603 3831,2733 r180 bottom (schematic designator C81)
C81B "0.1uF" 0603 3831,2137 r180 bottom (schematic designator C81)
C81C "0.1uF" 0603 3832,938 r180 bottom (schematic designator C81)
C81D "0.1uF" 0603 3832,340 r180 bottom (schematic designator C81)
C82 "10nF" 0603 1217,2597 r90 bottom
C83A "1uF" 0603 2544,2790 r90 top (schematic designator C83)
C83B "1uF" 0603 2544,2194 r90 top (schematic designator C83)
C83C "1uF" 0603 2545,995 r90 top (schematic designator C83)
C83D "1uF" 0603 2545,397 r90 top (schematic designator C83)
C84A "1nF" 0603 3144,2890 r180 top (schematic designator C84)
C84B "1nF" 0603 3144,2294 r180 top (schematic designator C84)
C84C "1nF" 0603 3145,1095 r180 top (schematic designator C84)
C84D "1nF" 0603 3145,497 r180 top (schematic designator C84)
C85A "1nF" 0603 2478,2792 r90 top (schematic designator C85)
C85B "1nF" 0603 2478,2196 r90 top (schematic designator C85)
C85C "1nF" 0603 2479,997 r90 top (schematic designator C85)
C85D "1nF" 0603 2479,399 r90 top (schematic designator C85)
C86A "0.1uF" 0603 2855,2883 r180 top (schematic designator C86)
C86B "0.1uF" 0603 2855,2287 r180 top (schematic designator C86)
C86C "0.1uF" 0603 2856,1088 r180 top (schematic designator C86)
C86D "0.1uF" 0603 2856,490 r180 top (schematic designator C86)
C87A "1uF" 0603 2985,2883 r180 top (schematic designator C87)
C87B "1uF" 0603 2985,2287 r180 top (schematic designator C87)
C87C "1uF" 0603 2986,1088 r180 top (schematic designator C87)
C87D "1uF" 0603 2986,490 r180 top (schematic designator C87)
C88AF "1uF" 0603 2139.37,2701.39 r180 top (schematic designator C88)
C88DF "1uF" 0603 2040,1476 r270 top (schematic designator C88)
C89AF "1nF" 0603 2139.49,2770.39 r180 top (schematic designator C89)
C89DF "1nF" 0603 2107,1476 r270 top (schematic designator C89)
C90AF "33uF" CC3225-1210 1655,2879 r0 top (schematic designator C90)
C90DF "33uF" CC3225-1210 1925.66,996.67 r90 top (schematic designator C90)
C91AF "1uF" 0603 1648,2721 r0 top (schematic designator C91)
C91DF "1uF" 0603 2084.66,965.67 r90 top (schematic designator C91)
C92AF "1nF" 0603 1648,2787 r0 top (schematic designator C92)
C92DF "1nF" 0603 2017.66,965.67 r90 top (schematic designator C92)
C93 "0.1uF" 0603 1302,896.87 r0 bottom
C94 "0.1uF" 0603 1782.27,565.22 r180 top
C95 "0.1uF" 0603 1912.04,567.13 r90 top
C96 "33uF" TANT4532 985.04,2526.73 r0 top
C97 "33uF" TANT4532 576.11,2691.7 r0 top
C98 "33uF" TANT4532 1617.73,3027.32 r90 top
C99 "10uF" TCASE-A 1155,3100 r0 top
C100 "33uF" TANT4532 584.7,2052.01 r0 top
C101 "33uF" TANT4532 1582.56,2443.19 r270 top
C102 "10uF" TCASE-A 2059.1,2262.87 r90 top
C103 "10nF" 0603 1615.08,1199.48 r0 top
C104 "33uF" TANT4532 848,808 r90 top
C105A "100pF" 0603 3957,3008 r90 top (schematic designator C105)
C105B "100pF" 0603 3960,2418 r90 top (schematic designator C105)
C105C "100pF" 0603 3951,1210 r90 top (schematic designator C105)
C105D "100pF" 0603 3954,613 r90 top (schematic designator C105)
C106 "10uF" TCASE-A 1727,1302 r180 top
C107 "33uF" TANT4532 680,1610 r270 top
C108 "33uF" TANT4532 1280,1560 r270 top
C109 "10nF" 0603 1981.42,3180.01 r270 top
C110 "10uF" TCASE-A 2077.01,3081.71 r90 top
C111 "33uF" TANT4532 1737,829 r180 top
C112A "100pF" 0603 4176,3019 r90 top (schematic designator C112)
C112B "100pF" 0603 4180,2427 r90 top (schematic designator C112)
C112C "100pF" 0603 4173,1230 r90 top (schematic designator C112)
C112D "100pF" 0603 4179,618 r90 top (schematic designator C112)
C113AF "1uF" 0603 1837,2803 r270 bottom (schematic designator C113)
C113DF "1uF" 0603 1973,1179 r0 bottom (schematic designator C113)
C114 "33uF" CC3225-1210 945.87,3343.73 r90 top
C115 "0.1uF" 0603 1055,3315 r90 top
C116 "33uF" CC3225-1210 1255.64,3342.83 r90 top
C117 "0.1uF" 0603 1160.64,3317.71 r90 top
C118 "33uF" CC3225-1210 964.96,317.44 r90 top
C119 "0.1uF" 0603 1057.49,293.4 r90 top
C120 "33uF" CC3225-1210 1300.06,318.09 r90 top
C121 "0.1uF" 0603 1179.96,292.38 r90 top
C122 "33uF" CC3225-1210 962.81,1174.27 r90 top
C123 "0.1uF" 0603 1056.42,1149.36 r90 top
C124 "33uF" CC3225-1210 1272.81,1176.77 r90 top
C125 "0.1uF" 0603 1177.81,1149.15 r90 top
C126AF "10nF" 0603 1903,2803 r270 bottom (schematic designator C126)
C126DF "10nF" 0603 1973,1244 r0 bottom (schematic designator C126)
C127 "0.1uF" 0603 779.09,1175 r270 top
C128AF "1uF" 0603 2043,2799 r270 bottom (schematic designator C128)
C128DF "1uF" 0603 1998,1400 r0 bottom (schematic designator C128)
C129AF "0.1uF" 0603 1977,2739 r90 bottom (schematic designator C129)
C129DF "0.1uF" 0603 2058,1332 r180 bottom (schematic designator C129)
C130 "0.1uF" 0603 1318.49,762 r90 top
CModeA "TestPoint" TP-3520-SK 3318,2743 r90 top (schematic designator CMode)
CModeB "TestPoint" TP-3520-SK 3336,2171 r90 top (schematic designator CMode)
CModeC "TestPoint" TP-3520-SK 3339,974 r90 top (schematic designator CMode)
CModeD "TestPoint" TP-3520-SK 3332,369 r90 top (schematic designator CMode)
DP1 "LED, 0805, Yellow" 0805L -364,3432 r0 top
DP2 "LED, 0805, Yellow" 0805L 35,3432.18 r180 bottom
FM1 "Fiducial" Fiducial_mark -656,123 r0 top
FM2 "Fiducial" Fiducial_mark -656,3477 r0 top
FM3 "Fiducial" Fiducial_mark 4000,123 r0 top
In5V5n "TestPoint" TP-3520-SK 1110,2175 r90 bottom
In5V5p "TestPoint" TP-3520-SK 1101,2083 r90 bottom
IoutAA "TestPoint" TP-3520-SK 3338,2827 r90 top (schematic designator IoutA)
IoutAB "TestPoint" TP-3520-SK 3337,2230 r90 top (schematic designator IoutA)
IoutAC "TestPoint" TP-3520-SK 3339,1037 r90 top (schematic designator IoutA)
IoutAD "TestPoint" TP-3520-SK 3336,436 r90 top (schematic designator IoutA)
IoutBA "TestPoint" TP-3520-SK 3306,3228 r90 top (schematic designator IoutB)
IoutBB "TestPoint" TP-3520-SK 3312,2626 r90 top (schematic designator IoutB)
IoutBC "TestPoint" TP-3520-SK 3314,1434 r90 top (schematic designator IoutB)
IoutBD "TestPoint" TP-3520-SK 3313,833 r90 top (schematic designator IoutB)
Ip3V7n "TestPoint" TP-3520-SK 988,874 r90 bottom
Ip3V7p "TestPoint" TP-3520-SK 918,878 r90 bottom
Ip5V5n "TestPoint" TP-3520-SK 1070,2953 r180 bottom
Ip5V5p "TestPoint" TP-3520-SK 943,3027 r180 bottom
J1 "IEEE1386 Amp120527-2 Plug 84pin" CON_AMP_1MM_84PINS 194.63,1908.37 r90 top locked
J2 "DB15_FEMALE" DSUB/RS.318/TM/15 4502.5,1342.5 r270 top locked
J3 "IEEE1386 Amp120527-1 Plug 64pin" CON_AMP_1MM_64PINS 194.63,3353.43 r90 top locked
J4 "Header 3pin 0.1\"" HDR1X3_MolexVertical -281,3179 r180 bottom
J5 "GroundClip" GroundClip 675,103.75 r0 top
J6 "20S-CBSA-2.75x3.0x" "SHIELD 2.75X3.00" 4237.63,3309 r270 top locked
J7 "GroundClip" GroundClip 1486,103.75 r0 top
J8 "GroundClip" GroundClip 3568,103.75 r0 top
L1 "3.3uH" 0603 2973,1892 r180 top
L2 "3.3uH" 0603 2777,1891 r180 top
L3 "3.3uH" 0603 2973,1824 r180 top
L4 "3.3uH" 0603 2777,1823 r180 top
L5 "3.3uH" 0603 2972,1755 r180 top
L6 "3.3uH" 0603 2776,1753 r180 top
L7 "3.3uH" 0603 2972,1687 r180 top
L8 "3.3uH" 0603 2776,1686 r180 top
L9A "PWB3010L_" PWB 3359,3105 r270 top (schematic designator L9)
L9B "PWB3010L_" PWB 3359,2509 r270 top (schematic designator L9)
L9C "PWB3010L_" PWB 3360,1310 r270 top (schematic designator L9)
L9D "PWB3010L_" PWB 3360,712 r270 top (schematic designator L9)
L10 "68uH" CHOKEPM54 1029,2826 r0 top
L11 "68uH" CHOKEPM54 1222.78,2312.28 r180 top
L12 "68uH" CHOKEPM54 1001.68,714.14 r0 top
L13 "68uH" CHOKEPM54 915,1480 r90 top
L14 "100uH 0805" 0805 4307,958 r0 bottom
L15 "1.5uH" IHLP-1212 895.42,2807.08 r90 top
L16 "1.5uH" IHLP-1212 904.01,2167.39 r90 top
L17 "100uH 0805" 0805 577,2556 r0 top
L18A "1uH, 0.5Ohms" 0805 4027,3003 r0 top (schematic designator L18)
L18B "1uH, 0.5Ohms" 0805 4029,2414 r0 top (schematic designator L18)
L18C "1uH, 0.5Ohms" 0805 4020,1214 r0 top (schematic designator L18)
L18D "1uH, 0.5Ohms" 0805 4022,611 r0 top (schematic designator L18)
L19A "1uH, 0.5Ohms" 0805 4028,3086 r0 top (schematic designator L19)
L19B "1uH, 0.5Ohms" 0805 4029,2499 r0 top (schematic designator L19)
L19C "1uH, 0.5Ohms" 0805 4020,1297 r0 top (schematic designator L19)
L19D "1uH, 0.5Ohms" 0805 4023,693 r0 top (schematic designator L19)
MH1 "mounting hole" MTHOLE.125 254.63,3529 r0 top
MH2 "mounting hole" MTHOLE.125 254.63,104 r0 top
MH3 "mounting hole" MTHOLE.125 4254.63,104 r0 top
MH4 "mounting hole" MTHOLE.125 4254.63,3529 r0 top
MH5 "mounting hole" MTHOLE.125 2579.63,3529 r0 top
MH6 "mounting hole" MTHOLE.125 3179.63,104 r0 top
P1 "Samtec - ASP-134602-01" BTB-SM1-27-2V400M -354.98,1897.99 r270 bottom
R1 "1k" 0603 3345,2060 r270 top
R2 "200" 0603 3108,1892 r0 top
R3 "49.9" 0603 3662,1929 r0 top
R4 "DNL" 0603 3793,1864 r90 top
R5 "402" 0603 2580,1888 r270 top
R6 "49.9" 0603 3663,1857 r0 top
R7 "200" 0603 3108,1825 r0 top
R8 "1k" 0603 3345,1860 r90 top
R9 "1k" 0603 3345,1730 r270 top
R10 "200" 0603 3107,1756 r0 top
R11 "49.9" 0603 3658,1603 r0 top
R12 "DNL" 0603 3787,1538 r90 top
R13 "402" 0603 2579,1749 r270 top
R14 "49.9" 0603 1852.59,2116.78 r270 top
R15 "49.9" 0603 3658,1532 r0 top
R16 "200" 0603 3107,1689 r0 top
R17 "1k" 0603 3345,1530 r90 top
R18 "53.6k" 0603 2197,1731 r180 top
R19A "249" 0603 3817,3190 r0 top (schematic designator R19)
R19B "249" 0603 3817,2597 r0 top (schematic designator R19)
R19C "249" 0603 3818,1398 r0 top (schematic designator R19)
R19D "249" 0603 3818,800 r0 top (schematic designator R19)
R20A "DNL" 0603 3570,2951 r270 bottom (schematic designator R20)
R20B "DNL" 0603 3570,2355 r270 bottom (schematic designator R20)
R20C "DNL" 0603 3571,1156 r270 bottom (schematic designator R20)
R20D "DNL" 0603 3571,558 r270 bottom (schematic designator R20)
R21A "10" 0603 4020,3228 r270 top (schematic designator R21)
R21B "10" 0603 4025,2636 r270 top (schematic designator R21)
R21C "10" 0603 4021,1433 r270 top (schematic designator R21)
R21D "10" 0603 4022,828 r270 top (schematic designator R21)
R22AF "4.99k" 0603 2078,2569 r90 top (schematic designator R22)
R22DF "4.99k" 0603 2308,1438 r180 top (schematic designator R22)
R23A "10" 0603 4024,2868 r90 top (schematic designator R23)
R23B "10" 0603 4020,2276 r90 top (schematic designator R23)
R23C "10" 0603 4020,1079 r90 top (schematic designator R23)
R23D "10" 0603 4020,476 r90 top (schematic designator R23)
R24A "249" 0603 3772,2806 r0 top (schematic designator R24)
R24B "249" 0603 3772,2210 r0 top (schematic designator R24)
R24C "249" 0603 3773,1011 r0 top (schematic designator R24)
R24D "249" 0603 3772,416 r0 top (schematic designator R24)
R25A "10k" 0603 3444,3033 r0 bottom (schematic designator R25)
R25B "10k" 0603 3444,2437 r0 bottom (schematic designator R25)
R25C "10k" 0603 3445,1238 r0 bottom (schematic designator R25)
R25D "10k" 0603 3445,640 r0 bottom (schematic designator R25)
R26A "120" 0603 2994,2815 r0 top (schematic designator R26)
R26B "120" 0603 2994,2219 r0 top (schematic designator R26)
R26C "120" 0603 2995,1020 r0 top (schematic designator R26)
R26D "120" 0603 2995,422 r0 top (schematic designator R26)
R27 "309k" 0603 1979.25,3051.3 r180 top
R28 "100k" 0603 1848.91,3051.84 r180 top
R29A "DNL" 0603 3184,2815 r180 top (schematic designator R29)
R29B "DNL" 0603 3184,2219 r180 top (schematic designator R29)
R29C "DNL" 0603 3185,1020 r180 top (schematic designator R29)
R29D "DNL" 0603 3185,422 r180 top (schematic designator R29)
R30A "120" 0603 2855,2953 r180 top (schematic designator R30)
R30B "120" 0603 2855,2357 r180 top (schematic designator R30)
R30C "120" 0603 2856,1158 r180 top (schematic designator R30)
R30D "120" 0603 2856,560 r180 top (schematic designator R30)
R31A "120" 0603 2985,2962 r180 top (schematic designator R31)
R31B "120" 0603 2985,2366 r180 top (schematic designator R31)
R31C "120" 0603 2986,1167 r180 top (schematic designator R31)
R31D "120" 0603 2986,569 r180 top (schematic designator R31)
R32AF "DNL" 0603 1788,2841 r90 top (schematic designator R32)
R32DF "DNL" 0603 1962,1125 r180 top (schematic designator R32)
R33 "249" 0603 1362,1061 r270 bottom
R34 "249" 0603 1721.44,496.8 r0 top
R35 "249" 0603 1851.93,497.9 r0 top
R36 "4.99" 0603 854.64,2330.26 r270 bottom
R37 "4.99" 0603 846.53,2909.87 r90 bottom
R38 "DNL" 0603 1805.8,2211.35 r0 top
R39 "31.6k" 0603 2092.37,2483.97 r180 top
R40 "100k" 0603 1866.44,2503.29 r180 top
R41 "105k" 0603 1743.34,1198.41 r270 top
R42 "100k" 0603 1743.88,1069.61 r270 top
R43 "0.1 0805" 0805 981.29,2992.76 r0 top
R44 "0.1 0805" 0805 1024,2060 r90 top
R45 "0.1 0805" 0805 815,710 r0 top
R46 "0.1 0805" 0805 650,1705 r0 top
R47 "0" 0603 1803,1555.88 r270 bottom
R48 "DNL" 0603 1802,1397 r0 bottom
R49A "0" 0603 3729,3137 r180 bottom (schematic designator R49)
R49B "0" 0603 3729,2541 r180 bottom (schematic designator R49)
R49C "0" 0603 3730,1342 r180 bottom (schematic designator R49)
R49D "0" 0603 3730,744 r180 bottom (schematic designator R49)
R50A "DNL" 0603 3728,3207 r180 bottom (schematic designator R50)
R50B "DNL" 0603 3728,2611 r180 bottom (schematic designator R50)
R50C "DNL" 0603 3729,1412 r180 bottom (schematic designator R50)
R50D "DNL" 0603 3729,814 r180 bottom (schematic designator R50)
R51A "DNL" 0603 2678,3089 r90 top (schematic designator R51)
R51B "DNL" 0603 2678,2493 r90 top (schematic designator R51)
R51C "DNL" 0603 2679,1294 r90 top (schematic designator R51)
R51D "DNL" 0603 2679,696 r90 top (schematic designator R51)
R52A "DNL" 0603 2476,2943 r0 top (schematic designator R52)
R52B "DNL" 0603 2476,2347 r0 top (schematic designator R52)
R52C "DNL" 0603 2477,1148 r0 top (schematic designator R52)
R52D "DNL" 0603 2477,550 r0 top (schematic designator R52)
R53A "DNL" 0603 2741,3021 r180 top (schematic designator R53)
R53B "DNL" 0603 2741,2425 r180 top (schematic designator R53)
R53C "DNL" 0603 2742,1226 r180 top (schematic designator R53)
R53D "DNL" 0603 2742,628 r180 top (schematic designator R53)
R54A "DNL" 0603 2744,3149 r270 top (schematic designator R54)
R54B "DNL" 0603 2744,2553 r270 top (schematic designator R54)
R54C "DNL" 0603 2745,1354 r270 top (schematic designator R54)
R54D "DNL" 0603 2745,756 r270 top (schematic designator R54)
R55A "0" 0603 2684,2939 r180 top (schematic designator R55)
R55B "0" 0603 2684,2343 r180 top (schematic designator R55)
R55C "0" 0603 2685,1144 r180 top (schematic designator R55)
R55D "0" 0603 2685,546 r180 top (schematic designator R55)
R56A "DNL" 0603 2624,2871 r0 top (schematic designator R56)
R56B "DNL" 0603 2624,2275 r0 top (schematic designator R56)
R56C "DNL" 0603 2625,1076 r0 top (schematic designator R56)
R56D "DNL" 0603 2625,478 r0 top (schematic designator R56)
R57A "0" 0603 2623,2796 r0 top (schematic designator R57)
R57B "0" 0603 2623,2200 r0 top (schematic designator R57)
R57C "0" 0603 2624,1001 r0 top (schematic designator R57)
R57D "0" 0603 2624,403 r0 top (schematic designator R57)
R58 "0" 0805 900.79,2929.97 r90 top
R59 "0" 0805 909.38,2290.28 r90 top
R60 "100k" 0603 728.52,2858.6 r90 top
R61 "100k" 0603 806.16,2222.84 r90 top
R62 "100k" 0603 800.45,2614.95 r90 bottom
R63 "100k" 0603 809.04,1975.27 r90 bottom
R64 "31.6k" 0603 576.38,2849.47 r0 bottom
R65 "31.6k" 0603 583.63,2204.42 r0 bottom
R66 "160k" 0603 712.9,2968.62 r270 bottom
R67 "160k" 0603 721.49,2328.94 r270 bottom
R68 "160k" 0603 715.64,2613.88 r90 bottom
R69 "160k" 0603 724.23,1974.19 r90 bottom
R70 "100k" 0603 575.85,2682.31 r0 bottom
R71 "100k" 0603 1051.59,2342.87 r90 bottom
R72 "31.6k" 0603 576.11,2749.12 r0 bottom
R73 "31.6k" 0603 584.7,2109.43 r0 bottom
R74 "100k" 0603 584.43,2042.62 r0 bottom
R75 "100k" 0603 983.97,2343.41 r90 bottom
R76A "0" 0603 3595,3176 r180 top (schematic designator R76)
R76B "0" 0603 3595,2580 r180 top (schematic designator R76)
R76C "0" 0603 3596,1381 r180 top (schematic designator R76)
R76D "0" 0603 3596,783 r180 top (schematic designator R76)
R77A "0" 0603 3534,2834 r0 top (schematic designator R77)
R77B "0" 0603 3534,2238 r0 top (schematic designator R77)
R77C "0" 0603 3535,1039 r0 top (schematic designator R77)
R77D "0" 0603 3535,441 r0 top (schematic designator R77)
R78 "0" 0805 516,3287 r270 top
R79 "0" 0805 733,1877 r0 top
R80 "0" 1206 1059.64,84.11 r0 top
R81 "0" 1206 1568.38,1558.83 r270 top
R82A "DNL" 0603 3465,2834 r180 top (schematic designator R82)
R82B "DNL" 0603 3465,2238 r180 top (schematic designator R82)
R82C "DNL" 0603 3466,1039 r180 top (schematic designator R82)
R82D "DNL" 0603 3466,441 r180 top (schematic designator R82)
R83A "DNL" 0603 3466,3176 r180 top (schematic designator R83)
R83B "DNL" 0603 3466,2580 r180 top (schematic designator R83)
R83C "DNL" 0603 3467,1381 r180 top (schematic designator R83)
R83D "DNL" 0603 3467,783 r180 top (schematic designator R83)
R84A "20" 0603 3661,3040 r270 top (schematic designator R84)
R84B "20" 0603 3661,2444 r270 top (schematic designator R84)
R84C "20" 0603 3662,1245 r270 top (schematic designator R84)
R84D "20" 0603 3662,647 r270 top (schematic designator R84)
R85 "309k" 0603 1128,2712 r180 bottom
R86 "100k" 0603 1069,2505 r0 bottom
R87A "31.6k" 0603 2110,2970 r0 bottom (schematic designator R87)
R87B "31.6k" 0603 2115,2330 r0 bottom (schematic designator R87)
R87C "31.6k" 0603 2130,1130 r0 bottom (schematic designator R87)
R87D "31.6k" 0603 2062.32,575 r0 bottom (schematic designator R87)
R88A "31.6k" 0603 2240,2910 r90 bottom (schematic designator R88)
R88B "31.6k" 0603 2245,2270 r90 bottom (schematic designator R88)
R88C "31.6k" 0603 2258,1070 r90 bottom (schematic designator R88)
R88D "31.6k" 0603 2192.32,575 r270 bottom (schematic designator R88)
R89A "31.6k" 0603 2110,2905.28 r0 bottom (schematic designator R89)
R89B "31.6k" 0603 2115,2265 r0 bottom (schematic designator R89)
R89C "31.6k" 0603 2130,1065 r0 bottom (schematic designator R89)
R89D "31.6k" 0603 2062.32,510 r0 bottom (schematic designator R89)
R90A "31.6k" 0603 2240,2840 r270 bottom (schematic designator R90)
R90B "31.6k" 0603 2245,2195 r270 bottom (schematic designator R90)
R90C "31.6k" 0603 2258,995 r270 bottom (schematic designator R90)
R90D "31.6k" 0603 2192.32,440 r270 bottom (schematic designator R90)
R91A "31.6k" 0603 2110,2840 r0 bottom (schematic designator R91)
R91B "31.6k" 0603 2115,2200 r0 bottom (schematic designator R91)
R91C "31.6k" 0603 2130,999 r0 bottom (schematic designator R91)
R91D "31.6k" 0603 2062.32,445 r0 bottom (schematic designator R91)
R92A "31.6k" 0603 2170,2775 r180 bottom (schematic designator R92)
R92B "31.6k" 0603 2175,2135 r180 bottom (schematic designator R92)
R92C "31.6k" 0603 2190,935 r180 bottom (schematic designator R92)
R92D "31.6k" 0603 2122.32,378.78 r180 bottom (schematic designator R92)
R93AF "4.99k" 0603 2146,2569 r90 top (schematic designator R93)
R93DF "4.99k" 0603 2177,1477 r270 top (schematic designator R93)
R94AF "4.99k" 0603 2082,2968 r180 top (schematic designator R94)
R94DF "4.99k" 0603 1830,1424 r270 top (schematic designator R94)
R95AF "DNL" 0603 2078,2900 r270 top (schematic designator R95)
R95DF "DNL" 0603 1903,1418 r0 top (schematic designator R95)
R96AF "499" 0603 1870,2579 r180 top (schematic designator R96)
R96DF "499" 0603 2224,1217 r270 top (schematic designator R96)
R97AF "499" 0603 1785,2719 r270 top (schematic designator R97)
R97DF "499" 0603 2086,1123 r0 top (schematic designator R97)
R98AF "499" 0603 1825,2968 r180 top (schematic designator R98)
R98DF "499" 0603 1831,1165 r270 top (schematic designator R98)
R99AF "499" 0603 1953.59,2968 r180 top (schematic designator R99)
R99DF "499" 0603 1830,1294 r270 top (schematic designator R99)
R100AF "4.99k" 0603 2000,2578 r180 top (schematic designator R100)
R100DF "4.99k" 0603 2222,1348 r270 top (schematic designator R100)
R101 "31.6k" 0603 649,1129 r0 top
R102 "4.99k" 0603 -433,3432 r180 top
R103 "348" 0603 -177,3432 r0 bottom
R104A "DNL" 0603 2441,2721 r180 bottom (schematic designator R104)
R104B "DNL" 0603 2437,2121 r180 bottom (schematic designator R104)
R104C "DNL" 0603 2442,920 r180 bottom (schematic designator R104)
R104D "DNL" 0603 2444,328 r180 bottom (schematic designator R104)
R105AF "DNL" 0603 2212,2284 r270 top (schematic designator R105)
R105DF "DNL" 0603 2249,1020 r270 top (schematic designator R105)
R106 "0" 0603 -712,2184 r270 top
R107 "DNL" 0603 1612,1363 r0 bottom
R108A "49.9" 0603 2686,3245 r180 top (schematic designator R108)
R108B "49.9" 0603 2558,2699 r0 top (schematic designator R108)
R108C "49.9" 0603 2642,1483 r0 top (schematic designator R108)
R108D "49.9" 0603 2626,897 r0 top (schematic designator R108)
R109 "0" 0805 1037,1921 r180 top
R110AF "0" 0603 1872,2607 r90 bottom (schematic designator R110)
R110DF "0" 0603 2176,1260.23 r180 bottom (schematic designator R110)
SlowDacDF "TestPoint" TP-3520-SK 1830,1048 r90 top (schematic designator SlowDac)
TMON1 "TestPoint" TP-3520-SK 761,2577 r90 top
TMON2 "TestPoint" TP-3520-SK 667.35,1954.87 r90 top
U1 "REF3312" SOT23 2163,1814 r180 top
U2 "TSA1204" TSQFP50P900X900X160-48N 1839.59,1790.78 r180 bottom
U3 "AD8138" SO8 3571,2065 r270 top
U4 "AD8138" SO8 3572,1737 r270 top
U5A "AD768" "SOIC 28 300mils" 2934,2994 r90 bottom (schematic designator U5)
U5B "AD768" "SOIC 28 300mils" 2934,2398 r90 bottom (schematic designator U5)
U5C "AD768" "SOIC 28 300mils" 2935,1199 r90 bottom (schematic designator U5)
U5D "AD768" "SOIC 28 300mils" 2935,601 r90 bottom (schematic designator U5)
U6A "LMH6628" SO8 3880,3102 r270 top (schematic designator U6)
U6B "LMH6628" SO8 3880,2506 r270 top (schematic designator U6)
U6C "LMH6628" SO8 3881,1307 r270 top (schematic designator U6)
U6D "LMH6628" SO8 3881,709 r270 top (schematic designator U6)
U7A "REF43" SO8 2379,3164 r0 top (schematic designator U7)
U7B "REF43" SO8 2379,2568 r0 top (schematic designator U7)
U7C "REF43" SO8 2380,1369 r0 top (schematic designator U7)
U7D "REF43" SO8 2380,771 r0 top (schematic designator U7)
U8A "DAC121S101CIMM" MSOP-8 2528,2868 r180 bottom (schematic designator U8)
U8B "DAC121S101CIMM" MSOP-8 2528,2272 r180 bottom (schematic designator U8)
U8C "DAC121S101CIMM" MSOP-8 2529,1073 r180 bottom (schematic designator U8)
U8D "DAC121S101CIMM" MSOP-8 2529,475 r180 bottom (schematic designator U8)
U9AF "DAC121S101CIMM" MSOP-8 1758,2818 r180 bottom (schematic designator U9)
U9DF "DAC121S101CIMM" MSOP-8 1985,1090 r270 bottom (schematic designator U9)
U10 "LTC3626" LTC3626 770.5,2787.76 r90 bottom
U11 "LTC3626" LTC3626 779.09,2148.07 r90 bottom
U12 "LT1962EMS8" MSOP-8 1921.14,3126.79 r180 top
U13 "LT1175IS8" SO8 1935.24,2281.47 r180 top
U14 "LT1962EMS8" MSOP-8 1672.51,1135.74 r270 top
U15 "SN74LVCH16T245 Transciever" TSSOP48-0.5mmpitch 1115.45,3295.43 r180 bottom
U16 "SN74LVCH16T245 Transciever" TSSOP48-0.5mmpitch 1122.46,309.88 r180 bottom
U17 "SN74LVCH16T245 Transciever" TSSOP48-0.5mmpitch 1122.81,1171.65 r180 bottom
U18 "LT1716CS5" SOT23-5 957.14,2234.47 r90 bottom
U19 "LT1962EMS8" MSOP-8 1148,2644 r180 bottom
U20AF "AD8138" SO8 1855,2673 r90 top (schematic designator U20)
U20DF "AD8138" SO8 2130,1195 r180 top (schematic designator U20)
U21 "74LVC1G07" SOT23-5 671,1303.53 r180 top
U22 "ADT7301ARTZ" SOT23-6 1247,791 r270 bottom
VRef "TestPoint" TP-3520-SK 2037,1604 r90 top

## Footprints (in the part's own frame and the unit in brackets; to place one, negate y for a bottom-side part, rotate by r counter-clockwise, add the part's x,y. Pads: shape width x height; smd on the part's side, far side on the other; paste and mask are expansions set on the pad)
0603 [mil]
  rect 36x32 smd: 1(0,0) 2(60,0)
  silkscreen extent -31,-30 90,30
0805 [mil]
  rect 38.5x52 smd: 1(0,0) 2(70,0)
  silkscreen extent -31,-38 101,38
0805L [mil]
  rect 50x50 smd: 1(-0.4,0.18) 2(83.6,0.18)
  silkscreen extent 31,-20 52,20
1206 [mil]
  rect 45x60 smd: 1(0,0) 2(105,0)
  silkscreen extent -34,-43 140,43
BTB-SM1-27-2V400M [mm] "Board-to-Board Connector, Vertical, 10-Row, Pitch 1.27mm, 400-Position"
  round 0.64 smd: A1(24.765,5.715) A2(23.495,5.715) A3(22.225,5.715) A4(20.955,5.715) A5(19.685,5.715) A6(18.415,5.715) A7(17.145,5.715) A8(15.875,5.715) A9(14.605,5.715) A10(13.335,5.715) A11(12.065,5.715) A12(10.795,5.715) A13(9.525,5.715) A14(8.255,5.715) A15(6.985,5.715) A16(5.715,5.715) A17(4.445,5.715) A18(3.175,5.715) A19(1.905,5.715) A20(0.635,5.715) A21(-0.635,5.715) A22(-1.905,5.715) A23(-3.175,5.715) A24(-4.445,5.715) A25(-5.715,5.715) A26(-6.985,5.715) A27(-8.255,5.715) A28(-9.525,5.715) A29(-10.795,5.715) A30(-12.065,5.715) A31(-13.335,5.715) A32(-14.605,5.715) A33(-15.875,5.715) A34(-17.145,5.715) A35(-18.415,5.715) A36(-19.685,5.715) A37(-20.955,5.715) A38(-22.225,5.715) A39(-23.495,5.715) A40(-24.765,5.715) B1(24.765,4.445) B2(23.495,4.445) B3(22.225,4.445) B4(20.955,4.445) B5(19.685,4.445) B6(18.415,4.445) B7(17.145,4.445) B8(15.875,4.445) B9(14.605,4.445) B10(13.335,4.445) B11(12.065,4.445) B12(10.795,4.445) B13(9.525,4.445) B14(8.255,4.445) B15(6.985,4.445) B16(5.715,4.445) B17(4.445,4.445) B18(3.175,4.445) B19(1.905,4.445) B20(0.635,4.445) B21(-0.635,4.445) B22(-1.905,4.445) B23(-3.175,4.445) B24(-4.445,4.445) B25(-5.715,4.445) B26(-6.985,4.445) B27(-8.255,4.445) B28(-9.525,4.445) B29(-10.795,4.445) B30(-12.065,4.445) B31(-13.335,4.445) B32(-14.605,4.445) B33(-15.875,4.445) B34(-17.145,4.445) B35(-18.415,4.445) B36(-19.685,4.445) B37(-20.955,4.445) B38(-22.225,4.445) B39(-23.495,4.445) B40(-24.765,4.445) C1(24.765,3.175) C2(23.495,3.175) C3(22.225,3.175) C4(20.955,3.175) C5(19.685,3.175) C6(18.415,3.175) C7(17.145,3.175) C8(15.875,3.175) C9(14.605,3.175) C10(13.335,3.175) C11(12.065,3.175) C12(10.795,3.175) C13(9.525,3.175) C14(8.255,3.175) C15(6.985,3.175) C16(5.715,3.175) C17(4.445,3.175) C18(3.175,3.175) C19(1.905,3.175) C20(0.635,3.175) C21(-0.635,3.175) C22(-1.905,3.175) C23(-3.175,3.175) C24(-4.445,3.175) C25(-5.715,3.175) C26(-6.985,3.175) C27(-8.255,3.175) C28(-9.525,3.175) C29(-10.795,3.175) C30(-12.065,3.175) C31(-13.335,3.175) C32(-14.605,3.175) C33(-15.875,3.175) C34(-17.145,3.175) C35(-18.415,3.175) C36(-19.685,3.175) C37(-20.955,3.175) C38(-22.225,3.175) C39(-23.495,3.175) C40(-24.765,3.175) D1(24.765,1.905) D2(23.495,1.905) D3(22.225,1.905) D4(20.955,1.905) D5(19.685,1.905) D6(18.415,1.905) D7(17.145,1.905) D8(15.875,1.905) D9(14.605,1.905) D10(13.335,1.905) D11(12.065,1.905) D12(10.795,1.905) D13(9.525,1.905) D14(8.255,1.905) D15(6.985,1.905) D16(5.715,1.905) D17(4.445,1.905) D18(3.175,1.905) D19(1.905,1.905) D20(0.635,1.905) D21(-0.635,1.905) D22(-1.905,1.905) D23(-3.175,1.905) D24(-4.445,1.905) D25(-5.715,1.905) D26(-6.985,1.905) D27(-8.255,1.905) D28(-9.525,1.905) D29(-10.795,1.905) D30(-12.065,1.905) D31(-13.335,1.905) D32(-14.605,1.905) D33(-15.875,1.905) D34(-17.145,1.905) D35(-18.415,1.905) D36(-19.685,1.905) D37(-20.955,1.905) D38(-22.225,1.905) D39(-23.495,1.905) D40(-24.765,1.905) E1(24.765,0.635) E2(23.495,0.635) E3(22.225,0.635) E4(20.955,0.635) E5(19.685,0.635) E6(18.415,0.635) E7(17.145,0.635) E8(15.875,0.635) E9(14.605,0.635) E10(13.335,0.635) E11(12.065,0.635) E12(10.795,0.635) E13(9.525,0.635) E14(8.255,0.635) E15(6.985,0.635) E16(5.715,0.635) E17(4.445,0.635) E18(3.175,0.635) E19(1.905,0.635) E20(0.635,0.635) E21(-0.635,0.635) E22(-1.905,0.635) E23(-3.175,0.635) E24(-4.445,0.635) E25(-5.715,0.635) E26(-6.985,0.635) E27(-8.255,0.635) E28(-9.525,0.635) E29(-10.795,0.635) E30(-12.065,0.635) E31(-13.335,0.635) E32(-14.605,0.635) E33(-15.875,0.635) E34(-17.145,0.635) E35(-18.415,0.635) E36(-19.685,0.635) E37(-20.955,0.635) E38(-22.225,0.635) E39(-23.495,0.635) E40(-24.765,0.635) F1(24.765,-0.635) F2(23.495,-0.635) F3(22.225,-0.635) F4(20.955,-0.635) F5(19.685,-0.635) F6(18.415,-0.635) F7(17.145,-0.635) F8(15.875,-0.635) F9(14.605,-0.635) F10(13.335,-0.635) F11(12.065,-0.635) F12(10.795,-0.635) F13(9.525,-0.635) F14(8.255,-0.635) F15(6.985,-0.635) F16(5.715,-0.635) F17(4.445,-0.635) F18(3.175,-0.635) F19(1.905,-0.635) F20(0.635,-0.635) F21(-0.635,-0.635) F22(-1.905,-0.635) F23(-3.175,-0.635) F24(-4.445,-0.635) F25(-5.715,-0.635) F26(-6.985,-0.635) F27(-8.255,-0.635) F28(-9.525,-0.635) F29(-10.795,-0.635) F30(-12.065,-0.635) F31(-13.335,-0.635) F32(-14.605,-0.635) F33(-15.875,-0.635) F34(-17.145,-0.635) F35(-18.415,-0.635) F36(-19.685,-0.635) F37(-20.955,-0.635) F38(-22.225,-0.635) F39(-23.495,-0.635) F40(-24.765,-0.635) G1(24.765,-1.905) G2(23.495,-1.905) G3(22.225,-1.905) G4(20.955,-1.905) G5(19.685,-1.905) G6(18.415,-1.905) G7(17.145,-1.905) G8(15.875,-1.905) G9(14.605,-1.905) G10(13.335,-1.905) G11(12.065,-1.905) G12(10.795,-1.905) G13(9.525,-1.905) G14(8.255,-1.905) G15(6.985,-1.905) G16(5.715,-1.905) G17(4.445,-1.905) G18(3.175,-1.905) G19(1.905,-1.905) G20(0.635,-1.905) G21(-0.635,-1.905) G22(-1.905,-1.905) G23(-3.175,-1.905) G24(-4.445,-1.905) G25(-5.715,-1.905) G26(-6.985,-1.905) G27(-8.255,-1.905) G28(-9.525,-1.905) G29(-10.795,-1.905) G30(-12.065,-1.905) G31(-13.335,-1.905) G32(-14.605,-1.905) G33(-15.875,-1.905) G34(-17.145,-1.905) G35(-18.415,-1.905) G36(-19.685,-1.905) G37(-20.955,-1.905) G38(-22.225,-1.905) G39(-23.495,-1.905) G40(-24.765,-1.905) H1(24.765,-3.175) H2(23.495,-3.175) H3(22.225,-3.175) H4(20.955,-3.175) H5(19.685,-3.175) H6(18.415,-3.175) H7(17.145,-3.175) H8(15.875,-3.175) H9(14.605,-3.175) H10(13.335,-3.175) H11(12.065,-3.175) H12(10.795,-3.175) H13(9.525,-3.175) H14(8.255,-3.175) H15(6.985,-3.175) H16(5.715,-3.175) H17(4.445,-3.175) H18(3.175,-3.175) H19(1.905,-3.175) H20(0.635,-3.175) H21(-0.635,-3.175) H22(-1.905,-3.175) H23(-3.175,-3.175) H24(-4.445,-3.175) H25(-5.715,-3.175) H26(-6.985,-3.175) H27(-8.255,-3.175) H28(-9.525,-3.175) H29(-10.795,-3.175) H30(-12.065,-3.175) H31(-13.335,-3.175) H32(-14.605,-3.175) H33(-15.875,-3.175) H34(-17.145,-3.175) H35(-18.415,-3.175) H36(-19.685,-3.175) H37(-20.955,-3.175) H38(-22.225,-3.175) H39(-23.495,-3.175) H40(-24.765,-3.175) J1(24.765,-4.445) J2(23.495,-4.445) J3(22.225,-4.445) J4(20.955,-4.445) J5(19.685,-4.445) J6(18.415,-4.445) J7(17.145,-4.445) J8(15.875,-4.445) J9(14.605,-4.445) J10(13.335,-4.445) J11(12.065,-4.445) J12(10.795,-4.445) J13(9.525,-4.445) J14(8.255,-4.445) J15(6.985,-4.445) J16(5.715,-4.445) J17(4.445,-4.445) J18(3.175,-4.445) J19(1.905,-4.445) J20(0.635,-4.445) J21(-0.635,-4.445) J22(-1.905,-4.445) J23(-3.175,-4.445) J24(-4.445,-4.445) J25(-5.715,-4.445) J26(-6.985,-4.445) J27(-8.255,-4.445) J28(-9.525,-4.445) J29(-10.795,-4.445) J30(-12.065,-4.445) J31(-13.335,-4.445) J32(-14.605,-4.445) J33(-15.875,-4.445) J34(-17.145,-4.445) J35(-18.415,-4.445) J36(-19.685,-4.445) J37(-20.955,-4.445) J38(-22.225,-4.445) J39(-23.495,-4.445) J40(-24.765,-4.445) K1(24.765,-5.715) K2(23.495,-5.715) K3(22.225,-5.715) K4(20.955,-5.715) K5(19.685,-5.715) K6(18.415,-5.715) K7(17.145,-5.715) K8(15.875,-5.715) K9(14.605,-5.715) K10(13.335,-5.715) K11(12.065,-5.715) K12(10.795,-5.715) K13(9.525,-5.715) K14(8.255,-5.715) K15(6.985,-5.715) K16(5.715,-5.715) K17(4.445,-5.715) K18(3.175,-5.715) K19(1.905,-5.715) K20(0.635,-5.715) K21(-0.635,-5.715) K22(-1.905,-5.715) K23(-3.175,-5.715) K24(-4.445,-5.715) K25(-5.715,-5.715) K26(-6.985,-5.715) K27(-8.255,-5.715) K28(-9.525,-5.715) K29(-10.795,-5.715) K30(-12.065,-5.715) K31(-13.335,-5.715) K32(-14.605,-5.715) K33(-15.875,-5.715) K34(-17.145,-5.715) K35(-18.415,-5.715) K36(-19.685,-5.715) K37(-20.955,-5.715) K38(-22.225,-5.715) K39(-23.495,-5.715) K40(-24.765,-5.715)
  round 0.97 hole 1.27 unplated: MH1(-27.19,-3.05) MH2(27.19,0)
  silkscreen extent -27.89,-7.34 28.78,7.34, body extent -27.89,-7.35 28.78,7.34, height 7.21
CC3225-1210 [mm]
  rect 1.6x2.7 smd: 1(-1.4,0) 2(1.4,0)
  silkscreen extent -0.3,-1.25 0.3,1.25
CHOKEPM54 [mil]
  rect 118.1x216.53 smd: 1(-0.4,0.12) 2(196.27,0.12)
  silkscreen extent 19,-114 204,114